# EAGLE board SparkFun_AzureWave_Module_Thing_Plus_AW-CU488-Panel_b (EAGLE 9.6.2), part 1 of 5
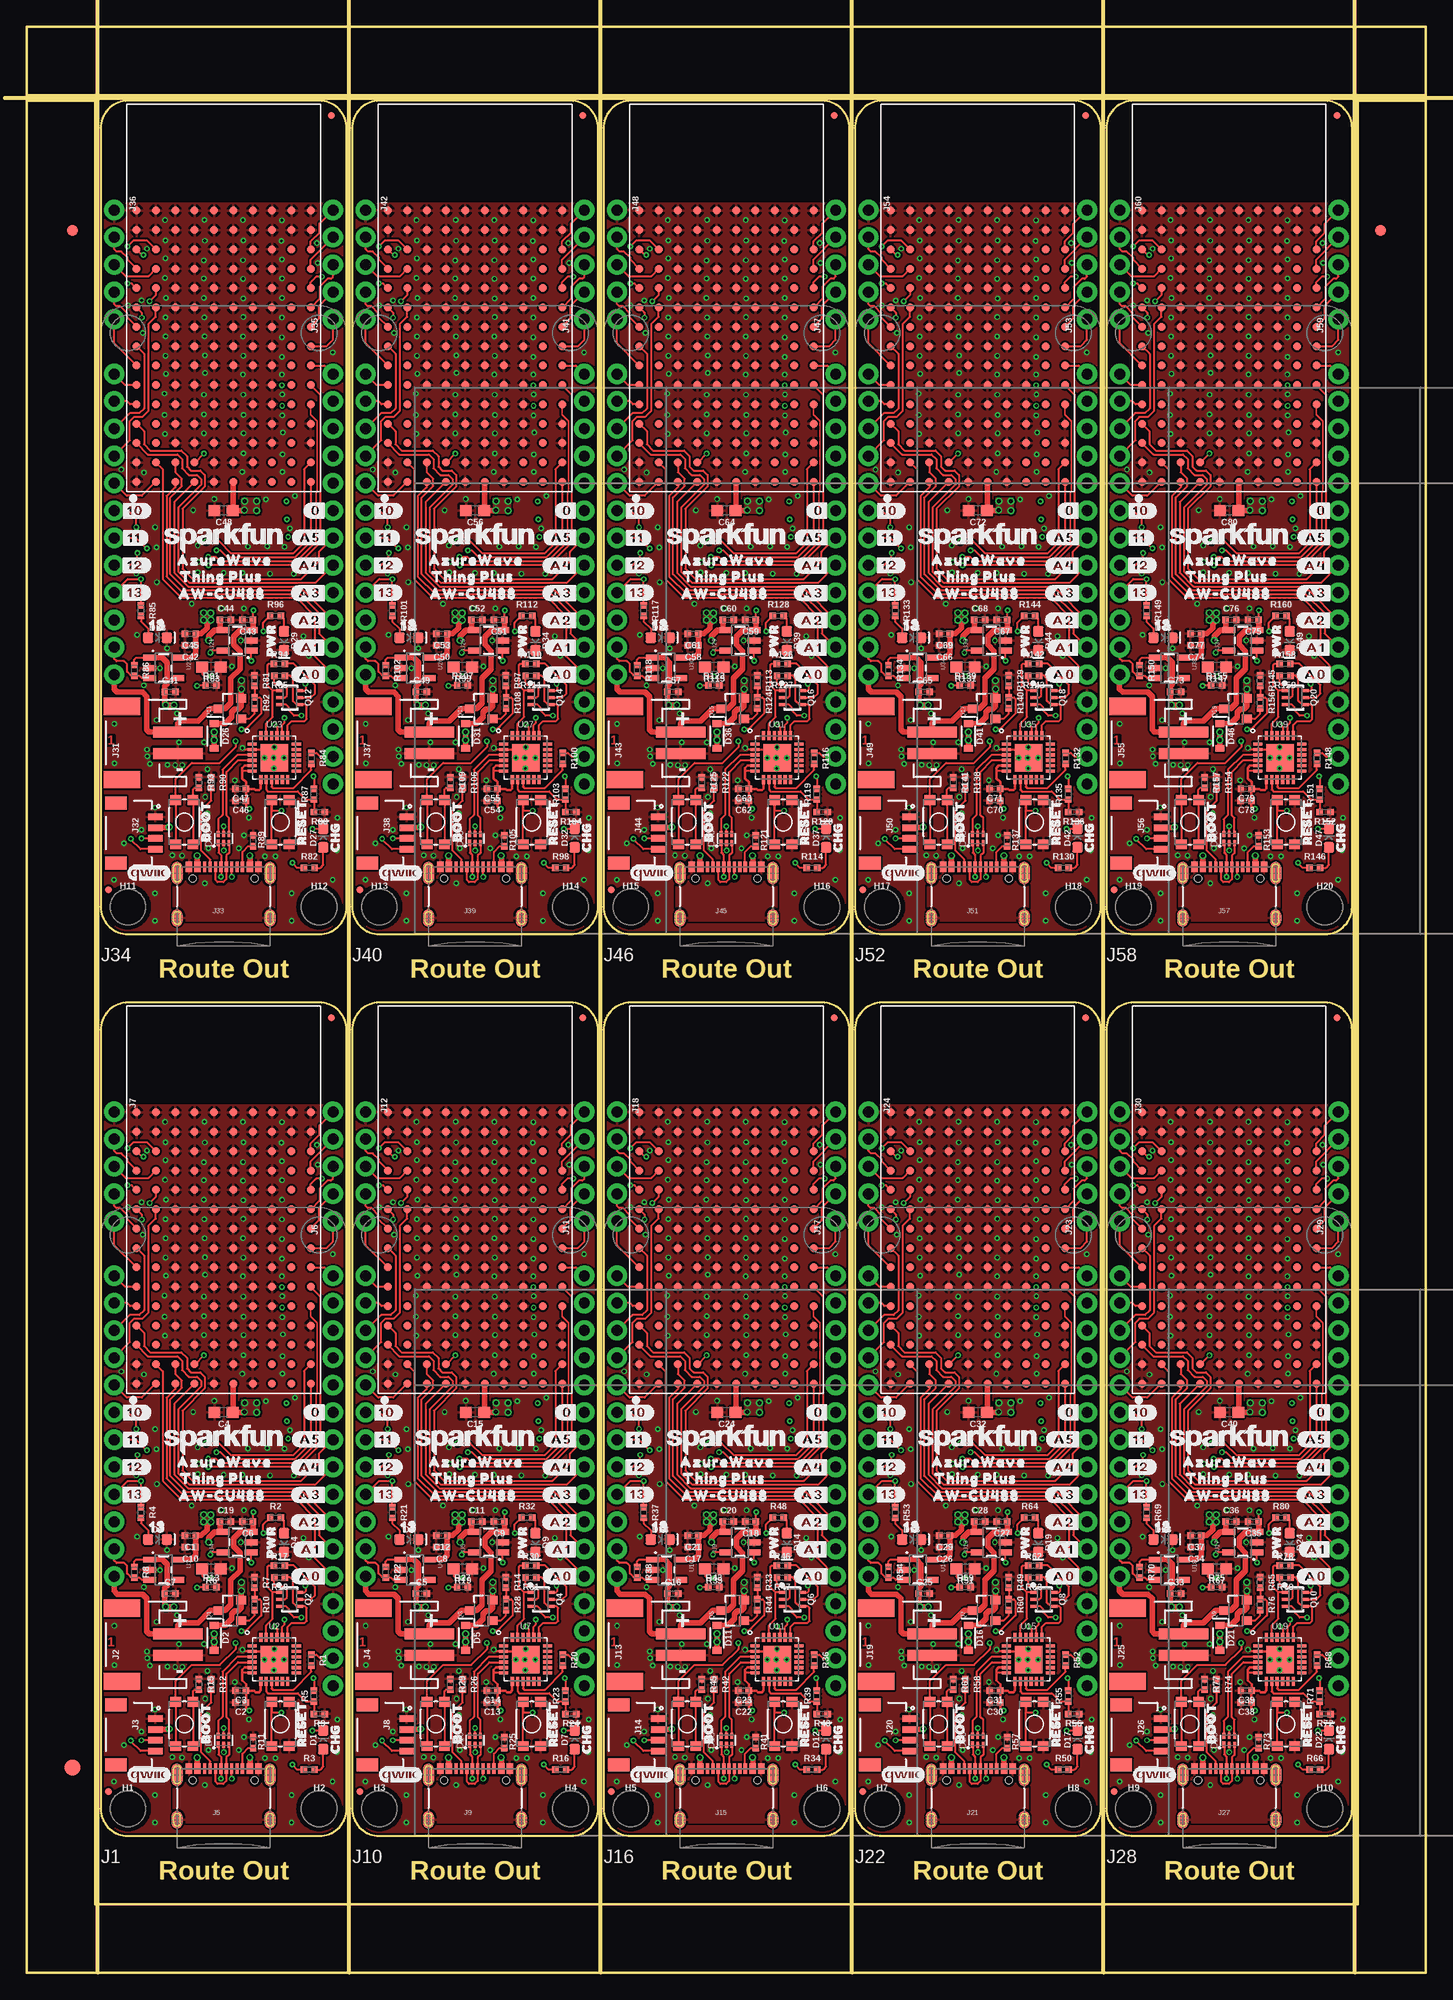
[diagram p0: board, top side]
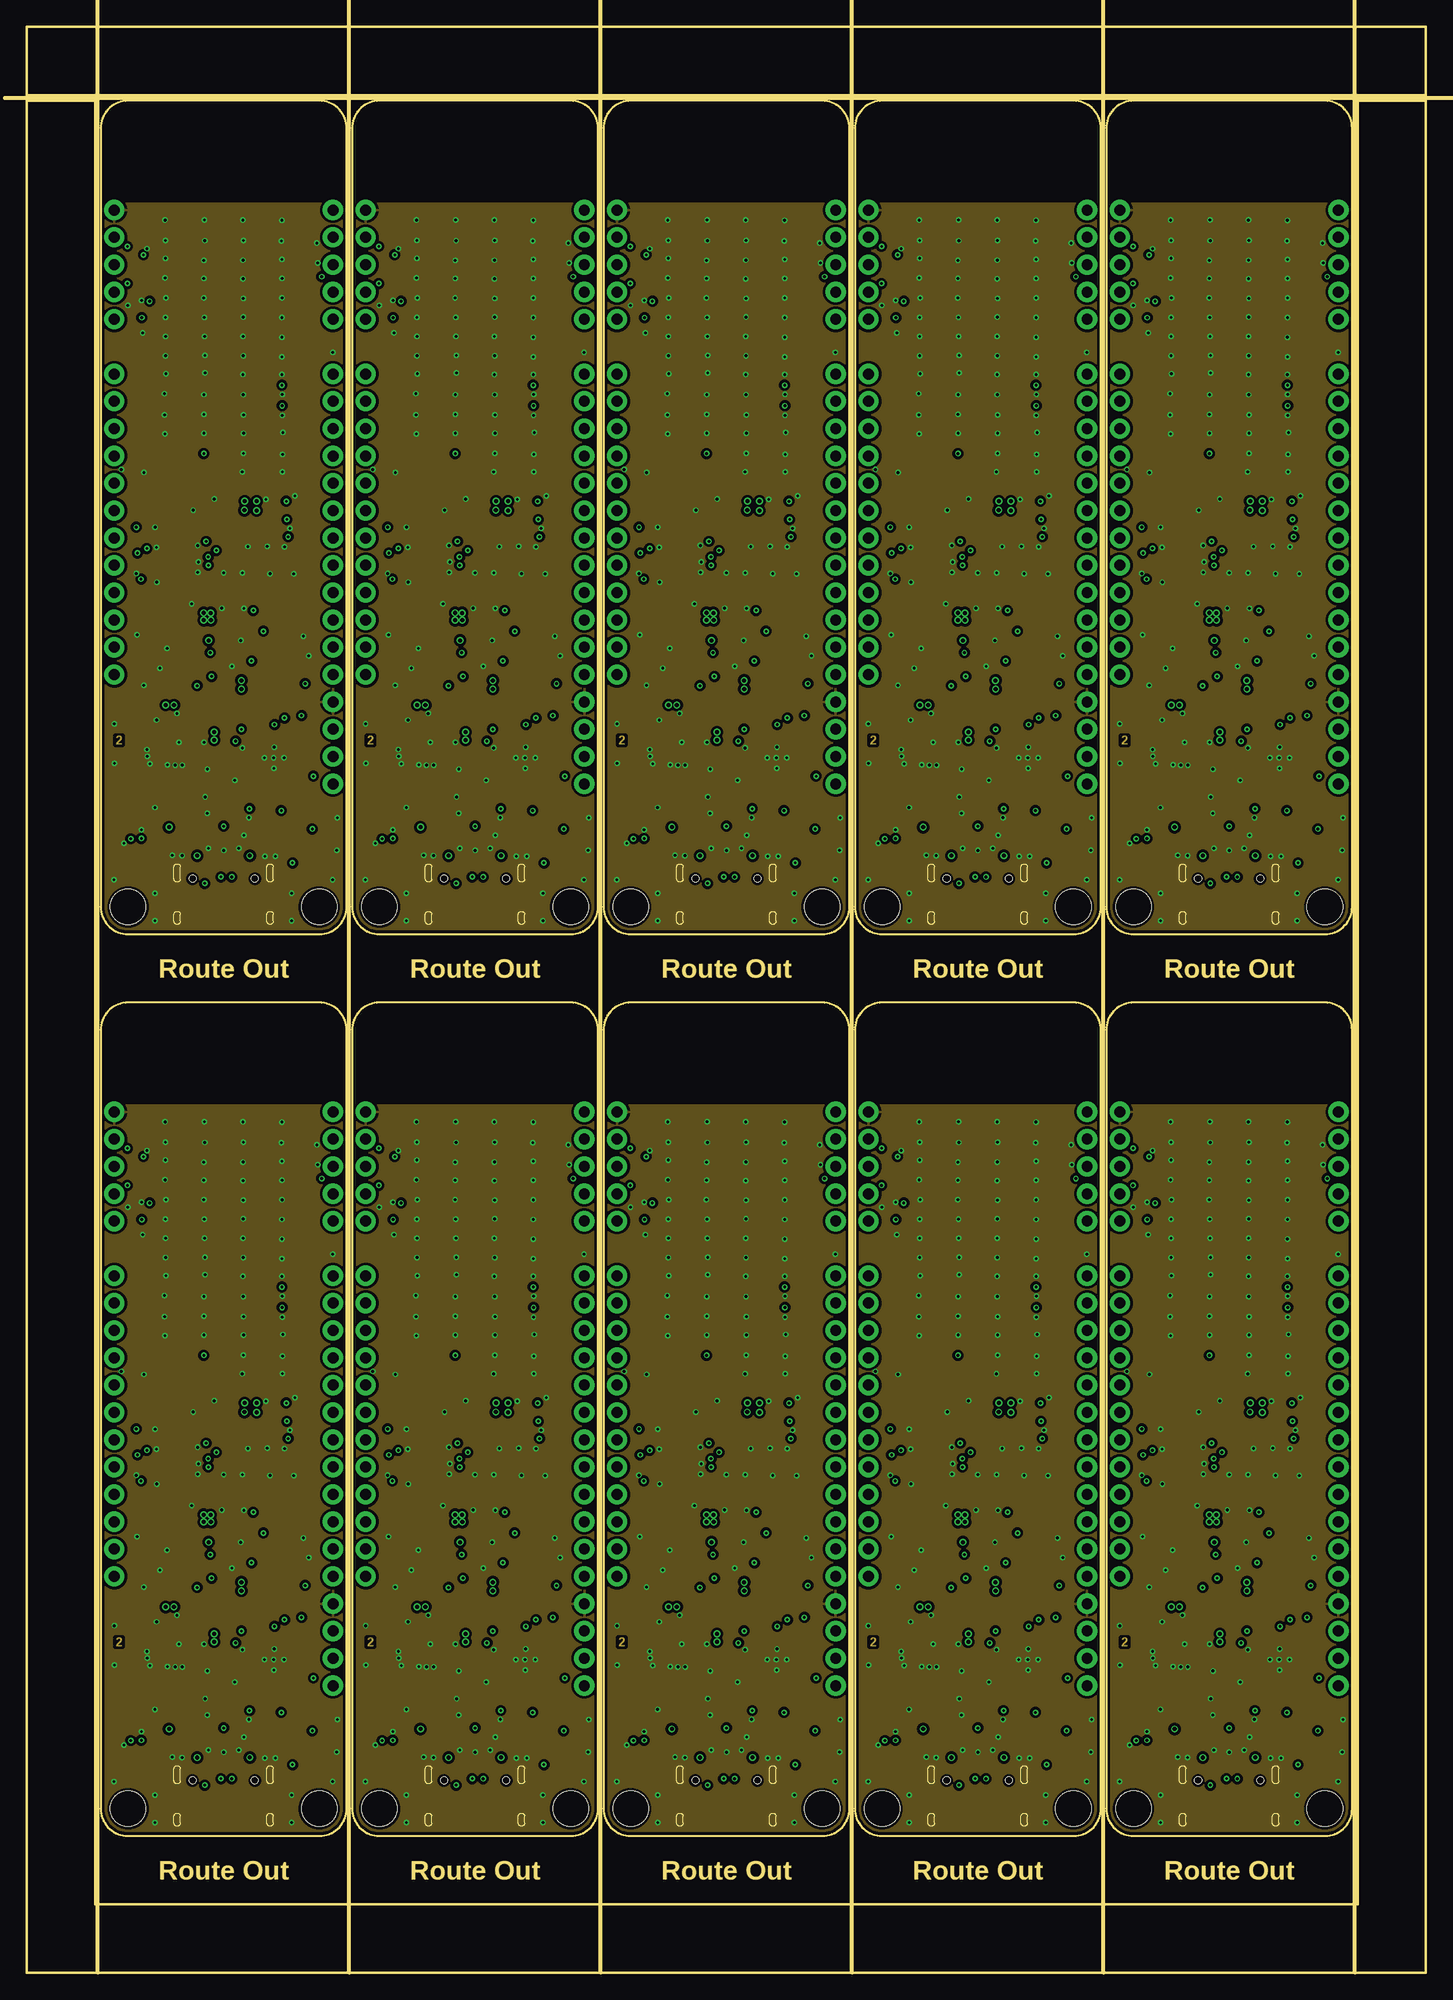
[diagram p1: board, inner layer Route2]
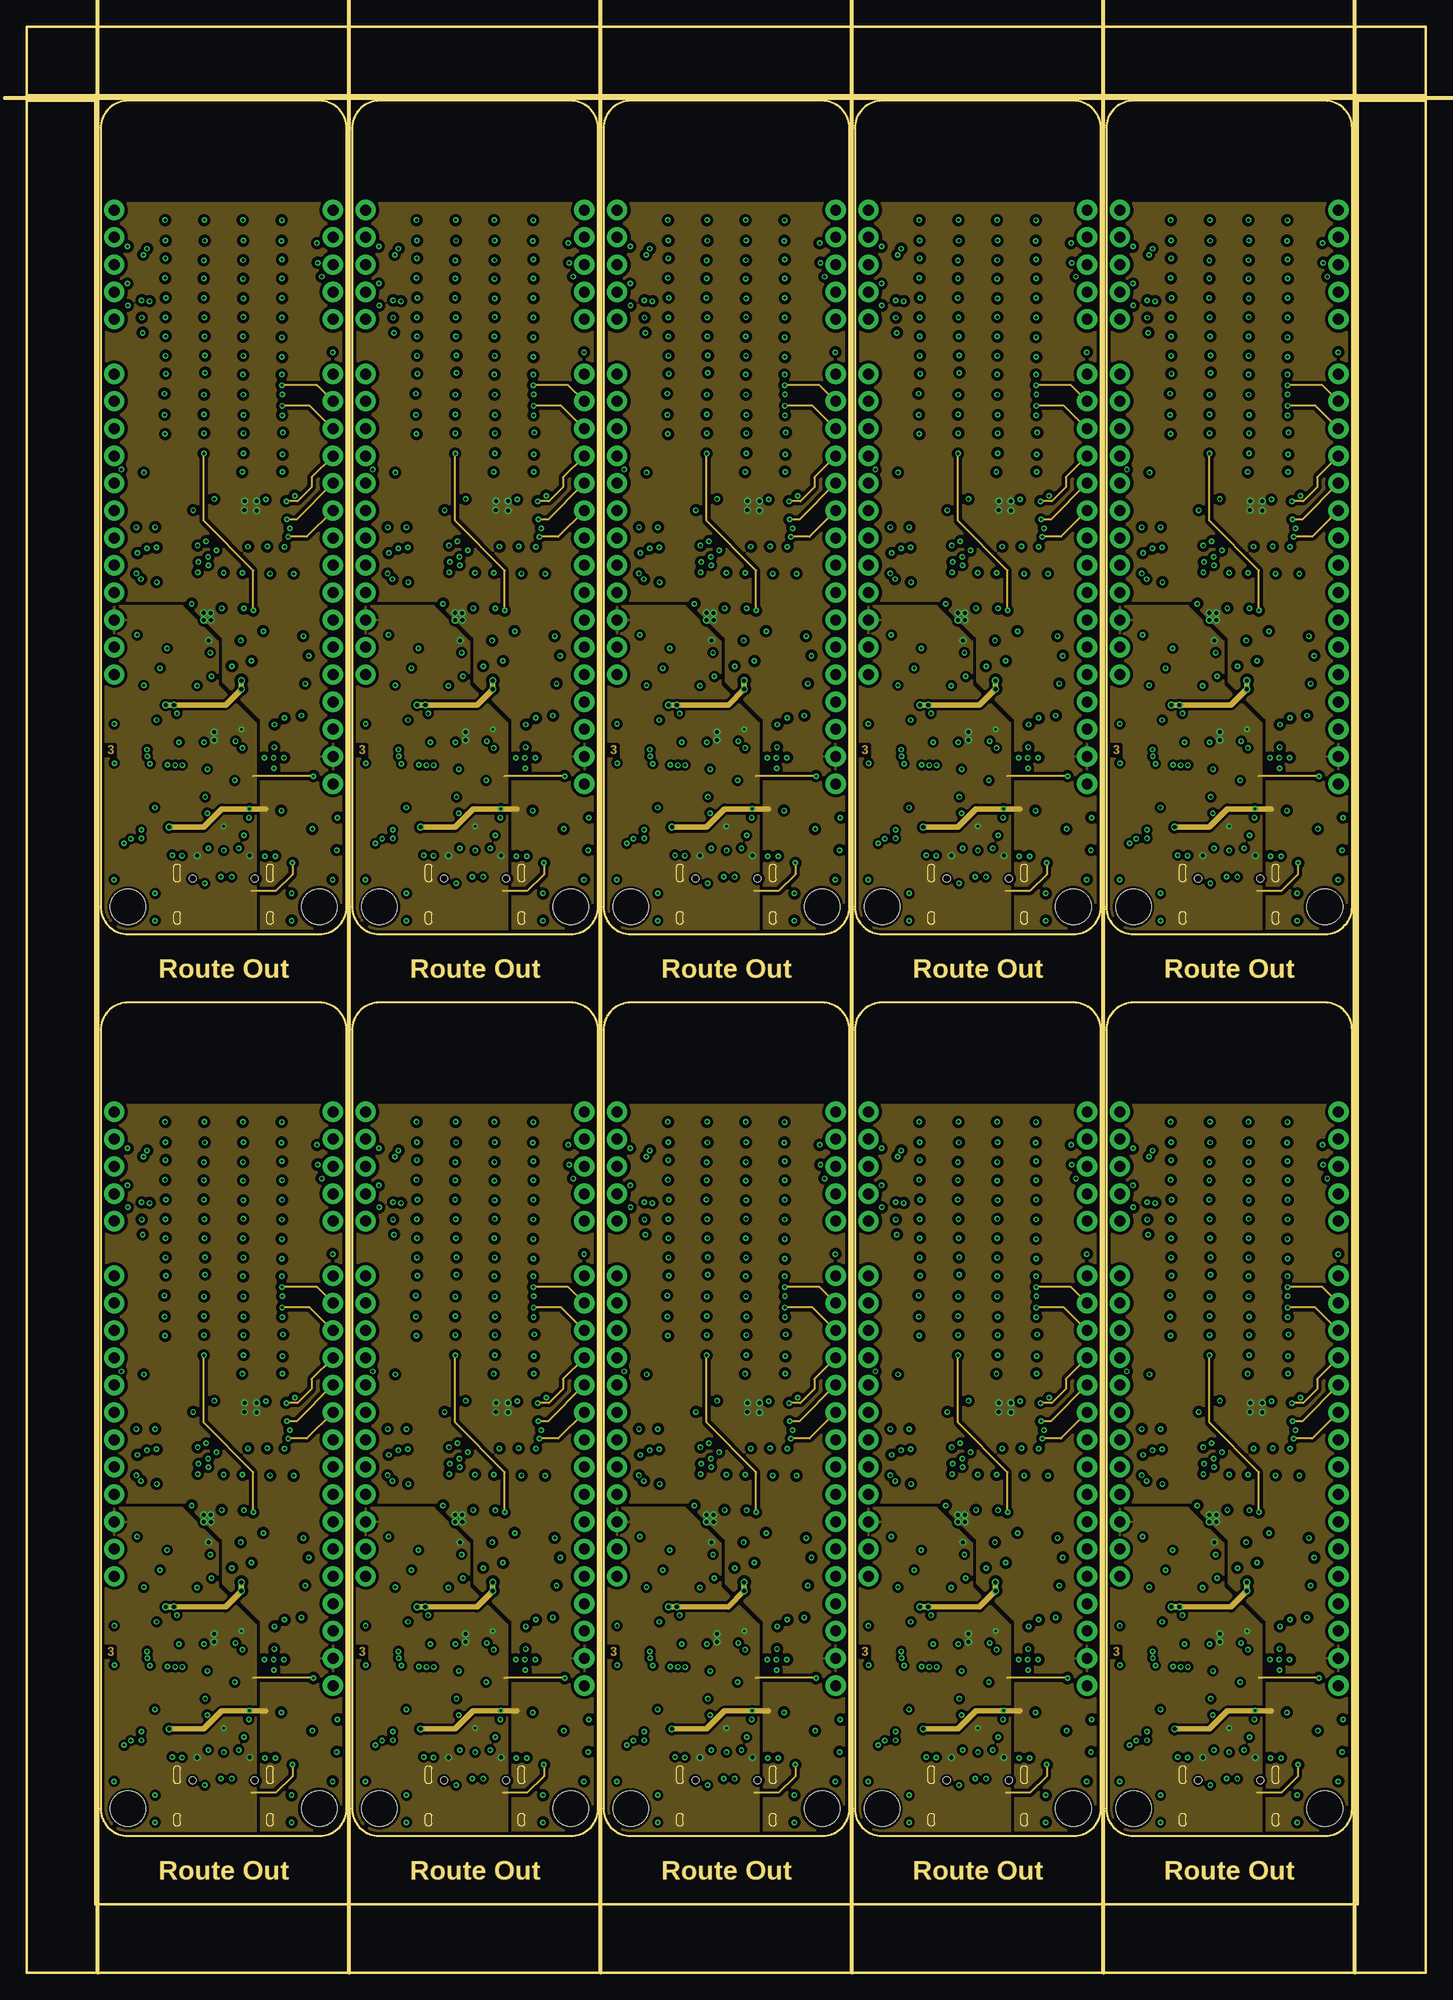
[diagram p2: board, inner layer Route15]
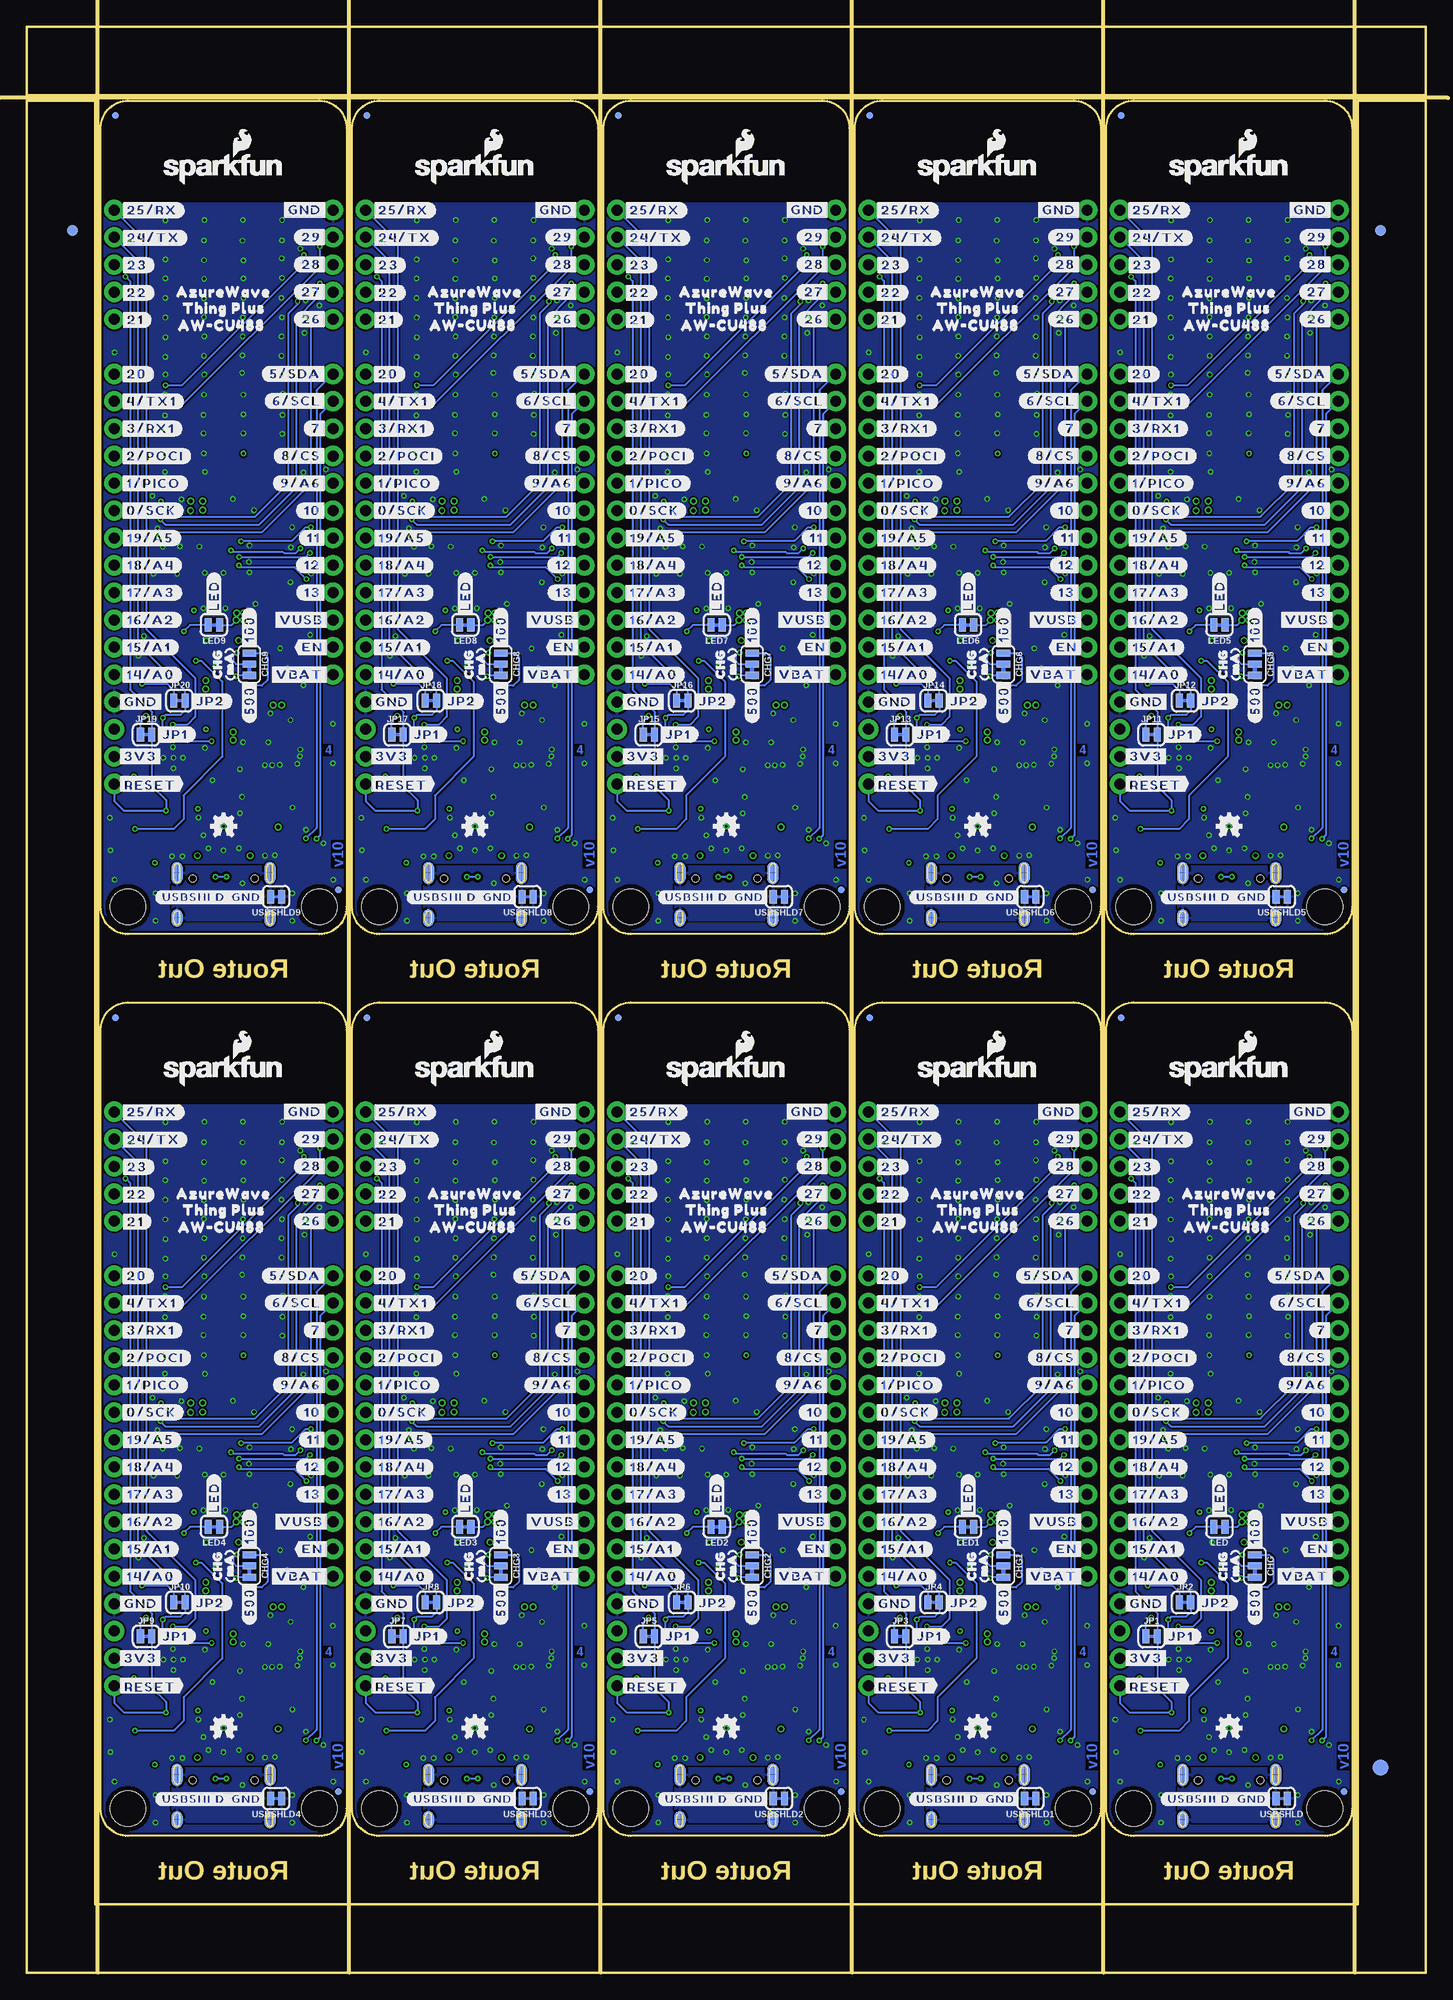
[diagram p3: board, bottom side, seen from below]

Size 130.05 x 180.85 mm. Coordinates in mm from the lower left corner, seen from the top.
Outline: 29.72,15.24 29.72,87.63 arc90 27.18,90.17 9.4,90.17 arc90 6.86,87.63 6.86,15.24 arc90 9.4,12.7 27.18,12.7 arc90 29.72,15.24
Outline: 53.09,15.24 53.09,87.63 arc90 50.55,90.17 32.77,90.17 arc90 30.23,87.63 30.23,15.24 arc90 32.77,12.7 50.55,12.7 arc90 53.09,15.24
Outline: 76.45,15.24 76.45,87.63 arc90 73.91,90.17 56.13,90.17 arc90 53.59,87.63 53.59,15.24 arc90 56.13,12.7 73.91,12.7 arc90 76.45,15.24
Outline: 99.82,15.24 99.82,87.63 arc90 97.28,90.17 79.5,90.17 arc90 76.96,87.63 76.96,15.24 arc90 79.5,12.7 97.28,12.7 arc90 99.82,15.24
Outline: 123.19,15.24 123.19,87.63 arc90 120.65,90.17 102.87,90.17 arc90 100.33,87.63 100.33,15.24 arc90 102.87,12.7 120.65,12.7 arc90 123.19,15.24
Outline: 29.72,99.06 29.72,171.45 arc90 27.18,173.99 9.4,173.99 arc90 6.86,171.45 6.86,99.06 arc90 9.4,96.52 27.18,96.52 arc90 29.72,99.06
Outline: 53.09,99.06 53.09,171.45 arc90 50.55,173.99 32.77,173.99 arc90 30.23,171.45 30.23,99.06 arc90 32.77,96.52 50.55,96.52 arc90 53.09,99.06
Outline: 76.45,99.06 76.45,171.45 arc90 73.91,173.99 56.13,173.99 arc90 53.59,171.45 53.59,99.06 arc90 56.13,96.52 73.91,96.52 arc90 76.45,99.06
Outline: 99.82,99.06 99.82,171.45 arc90 97.28,173.99 79.5,173.99 arc90 76.96,171.45 76.96,99.06 arc90 79.5,96.52 97.28,96.52 arc90 99.82,99.06
Outline: 123.19,99.06 123.19,171.45 arc90 120.65,173.99 102.87,173.99 arc90 100.33,171.45 100.33,99.06 arc90 102.87,96.52 120.65,96.52 arc90 123.19,99.06
Outline: 6.35,6.35 123.7,6.35 123.7,173.99 130.05,173.99 130.05,0 0,0 0,6.35 0,173.99 6.35,173.99 6.35,6.35
Outline: 0,180.85 130.05,180.85 130.05,174.5 0,174.5 0,180.85
Copper layers (1*2*15*16): Top 0.035559375mm / dielectric 0.47751875mm / Route2 0.035559375mm / dielectric 0.47751875mm / Route15 0.035559375mm / dielectric 0.47751875mm / Bottom 0.035559375mm
Design rules "SparkFun_AzureWave_Module_Thing_Plus_AW-CU488": minimum track width 5mil, minimum drill 0.2mm, track to track 5mil, track to pad 5mil, pad to pad 5mil, via to via 5mil, smd to smd 5mil, copper to edge 7mil, drill to drill 7mil, minimum pad ring 5mil, minimum via ring 5mil, stop-mask expansion 2.5mil, vias tented up to drill 25mil, thermal gap 10mil
tRestrict: area 24.4,29 to 24.4,29.2; area 21.6,29 to 21.6,29.3; area 22.9,27.7 to 23.1,27.8; area 22.8,30.5 to 23.1,30.5; area 47.7,29 to 47.8,29.2; area 44.9,29 to 45,29.3; area 46.2,27.7 to 46.5,27.8; area 46.2,30.5 to 46.5,30.5; area 71.1,29 to 71.2,29.2; area 68.3,29 to 68.4,29.3; area 69.6,27.7 to 69.8,27.8; area 69.6,30.5 to 69.8,30.5; area 94.5,29 to 94.5,29.2; area 91.7,29 to 91.7,29.3; area 93,27.7 to 93.2,27.8; area 92.9,30.5 to 93.2,30.5; area 117.8,29 to 117.9,29.2; area 115,29 to 115.1,29.3; area 116.3,27.7 to 116.6,27.8; area 116.3,30.5 to 116.6,30.5; area 24.4,112.8 to 24.4,113.1; area 21.6,112.8 to 21.6,113.1; area 22.9,111.5 to 23.1,111.6; area 22.8,114.3 to 23.1,114.4; area 47.7,112.8 to 47.8,113.1; area 44.9,112.8 to 45,113.1; area 46.2,111.5 to 46.5,111.6; area 46.2,114.3 to 46.5,114.4; area 71.1,112.8 to 71.2,113.1; area 68.3,112.8 to 68.4,113.1; area 69.6,111.5 to 69.8,111.6; area 69.6,114.3 to 69.8,114.4; area 94.5,112.8 to 94.5,113.1; area 91.7,112.8 to 91.7,113.1; area 93,111.5 to 93.2,111.6; area 92.9,114.3 to 93.2,114.4; area 117.8,112.8 to 117.9,113.1; area 115,112.8 to 115.1,113.1; area 116.3,111.5 to 116.6,111.6; area 116.3,114.3 to 116.6,114.4
Milling: 7 lines

## Footprints (pad centres in the part's own frame; a part is rotated, then mirrored left to right if it is on the bottom)
0402-TIGHT = smd 0.6 x 0.6: 1 -0.5,0; 2 0.5,0
0603 = smd 1.1 x 1: 1 -0.85,0; 2 0.85,0
SMT-JUMPER_3_1-NC_TRACE_SILK = smd 0.66 x 1.27: 1 -1.041,0; 2 0,0; 3 1.041,0
LED-0603 = smd 1 x 1: A -0.877,0; C 0.877,0
SOD-323 = smd 0.63 x 0.83: A 1.15,0; C -1.15,0
SOT886 = smd 0.61 x 0.25: 1 -0.405,0.5 | smd 0.56 x 0.25: 2 -0.43,0; 3 -0.43,-0.5; 4 0.43,-0.5; 5 0.43,0; 6 0.43,0.5
FIDUCIAL-1X2 = smd 1 x 1: 1 0,0
FIDUCIAL-1.5X3 = smd 1.5 x 1.5: 1 0,0
FIDUCIAL-MICRO = smd 0.635 x 0.635: 1 0,0
STAND-OFF = hole 3.302: 0,0
THING_PLUS = drill 1.016 pad 1.88: 1 1.27,52.07; 2 1.27,49.53; 3 1.27,46.99; 4 1.27,44.45; 5 1.27,41.91; 6 1.27,39.37; 7 1.27,36.83; 8 1.27,34.29; 9 1.27,31.75; 10 1.27,29.21; 11 1.27,26.67; 12 1.27,24.13; 13 21.59,52.07; 14 21.59,49.53; 15 21.59,46.99; 16 21.59,44.45; 17 21.59,41.91; 18 21.59,39.37; 19 21.59,36.83; 20 21.59,34.29; 21 21.59,31.75; 22 21.59,29.21; 23 21.59,26.67; 24 21.59,24.13; 25 21.59,21.59; 26 21.59,19.05; 27 21.59,16.51; 28 21.59,13.97
JST-2-SMD = smd 1 x 4.6: 1 -1,-3.7; 2 1,-3.7 | smd 1.6 x 3.4: NC1 -3.4,1.5; NC2 3.4,1.5
JST04_1MM_RA = smd 0.6 x 1.35: 1 -1.5,0; 2 -0.5,0; 3 0.5,0; 4 1.5,0 | smd 1.2 x 2: NC1 2.8,-3.675; NC2 -2.8,-3.675
USB-C-16P-4LAYER-ISOLATED = smd 0.3 x 1: A5 -1.25,-0.34; A6 -0.25,-0.34; A7 0.25,-0.34; A8 1.25,-0.34; B5 1.75,-0.34; B6 0.75,-0.34; B7 -0.75,-0.34; B8 -1.75,-0.34 | smd 0.6 x 1: GND -3.225,-0.34; GND2 3.225,-0.34; VBUS1 -2.45,-0.34; VBUS2 2.45,-0.34 | smd 1 x 2.1: SHLD1 -4.32,-0.915; SHLD2 4.32,-0.915 | smd 1 x 2.1 bottom: SHLD3 -4.32,-0.915; SHLD4 4.32,-0.915 | smd 1 x 1.6: SHLD5 -4.32,-5.095; SHLD8 4.32,-5.095 | smd 1 x 1.6 bottom: SHLD6 -4.32,-5.095; SHLD7 4.32,-5.095 | hole 0.65: -2.89,-1.445; 2.89,-1.445
1X05_NO_SILK = drill 1.016 pad 1.88: 1 0,0; 2 2.54,0; 3 5.08,0; 4 7.62,0; 5 10.16,0
SMT-JUMPER_2_NC_TRACE_SILK = smd 0.66 x 1.27: 1 -0.521,0; 2 0.521,0
SOT23-3 = smd 0.8 x 0.9: 1 -0.95,-1; 2 0.95,-1; 3 0,1.1
SC70-6 = smd 0.3 x 0.66: 1 -0.65,-0.92; 2 0,-0.92; 3 0.65,-0.92; 4 0.65,0.92; 5 0,0.92; 6 -0.65,0.92
TACTILE_SWITCH_SMD_4.6X2.8MM = smd 0.9 x 1: 1 -2.05,-0.8; 2 2.05,-0.8; 3 2.05,0.8; 4 -2.05,0.8
LGA150_AW-CU488 = smd 0.75 x 0.75: A1 15.1,-8.1; A2 13.3,-8.1; A3 11.5,-8.1; A4 9.7,-8.1; A5 7.9,-8.1; A6 6.1,-8.1; A7 4.3,-8.1; A8 2.5,-8.1; A9 0.7,-8.1; A10 -1.1,-8.1; A11 -2.9,-8.1; A12 -4.7,-8.1; A13 -6.5,-8.1; A14 -8.3,-8.1; A15 -10.1,-8.1; B1 15.1,-6.3; B2 13.3,-6.3; B3 11.5,-6.3; B4 9.7,-6.3; B5 7.9,-6.3; B6 6.1,-6.3; B7 4.3,-6.3; B8 2.5,-6.3; B9 0.7,-6.3; B10 -1.1,-6.3; B11 -2.9,-6.3; B12 -4.7,-6.3; B13 -6.5,-6.3; B14 -8.3,-6.3; B15 -10.1,-6.3; C1 15.1,-4.5; C2 13.3,-4.5; C3 11.5,-4.5; C4 9.7,-4.5; C5 7.9,-4.5; C6 6.1,-4.5; C7 4.3,-4.5; C8 2.5,-4.5; C9 0.7,-4.5; C10 -1.1,-4.5; C11 -2.9,-4.5; C12 -4.7,-4.5; C13 -6.5,-4.5; C14 -8.3,-4.5; C15 -10.1,-4.5; D1 15.1,-2.7; D2 13.3,-2.7; D3 11.5,-2.7; D4 9.7,-2.7; D5 7.9,-2.7; D6 6.1,-2.7; D7 4.3,-2.7; D8 2.5,-2.7; D9 0.7,-2.7; D10 -1.1,-2.7; D11 -2.9,-2.7; D12 -4.7,-2.7; D13 -6.5,-2.7; D14 -8.3,-2.7; D15 -10.1,-2.7; E1 15.1,-0.9; E2 13.3,-0.9; E3 11.5,-0.9; E4 9.7,-0.9; E5 7.9,-0.9; E6 6.1,-0.9; E7 4.3,-0.9; E8 2.5,-0.9; E9 0.7,-0.9; E10 -1.1,-0.9; E11 -2.9,-0.9; E12 -4.7,-0.9; E13 -6.5,-0.9; E14 -8.3,-0.9; E15 -10.1,-0.9; F1 15.1,0.9; F2 13.3,0.9; F3 11.5,0.9; F4 9.7,0.9; F5 7.9,0.9; F6 6.1,0.9; F7 4.3,0.9; F8 2.5,0.9; F9 0.7,0.9; F10 -1.1,0.9; F11 -2.9,0.9; F12 -4.7,0.9; F13 -6.5,0.9; F14 -8.3,0.9; F15 -10.1,0.9; G1 15.1,2.7; G2 13.3,2.7; G3 11.5,2.7; G4 9.7,2.7; G5 7.9,2.7; G6 6.1,2.7; G7 4.3,2.7; G8 2.5,2.7; G9 0.7,2.7; G10 -1.1,2.7; G11 -2.9,2.7; G12 -4.7,2.7; G13 -6.5,2.7; G14 -8.3,2.7; G15 -10.1,2.7; H1 15.1,4.5; H2 13.3,4.5; H3 11.5,4.5; H4 9.7,4.5; H5 7.9,4.5; H6 6.1,4.5; H7 4.3,4.5; H8 2.5,4.5; H9 0.7,4.5; H10 -1.1,4.5; H11 -2.9,4.5; H12 -4.7,4.5; H13 -6.5,4.5; H14 -8.3,4.5; H15 -10.1,4.5; J1 15.1,6.3; J2 13.3,6.3; J3 11.5,6.3; J4 9.7,6.3; J5 7.9,6.3; J6 6.1,6.3; J7 4.3,6.3; J8 2.5,6.3; J9 0.7,6.3; J10 -1.1,6.3; J11 -2.9,6.3; J12 -4.7,6.3; J13 -6.5,6.3; J14 -8.3,6.3; J15 -10.1,6.3; K1 15.1,8.1; K2 13.3,8.1; K3 11.5,8.1; K4 9.7,8.1; K5 7.9,8.1; K6 6.1,8.1; K7 4.3,8.1; K8 2.5,8.1; K9 0.7,8.1; K10 -1.1,8.1; K11 -2.9,8.1; K12 -4.7,8.1; K13 -6.5,8.1; K14 -8.3,8.1; K15 -10.1,8.1
QFN24 = smd 0.85 x 0.3: 1 -2.05,1.25; 2 -2.05,0.75; 3 -2.05,0.25; 4 -2.05,-0.25; 5 -2.05,-0.75; 6 -2.05,-1.25; 13 2.05,-1.25; 14 2.05,-0.75; 15 2.05,-0.25; 16 2.05,0.25; 17 2.05,0.75; 18 2.05,1.25 | smd 0.3 x 0.85: 7 -1.25,-2.05; 8 -0.75,-2.05; 9 -0.25,-2.05; 10 0.25,-2.05; 11 0.75,-2.05; 12 1.25,-2.05; 19 1.25,2.05; 20 0.75,2.05; 21 0.25,2.05; 22 -0.25,2.05; 23 -0.75,2.05; 24 -1.25,2.05 | smd 2.55 x 2.55: PAD 0,0
SOT23-5 = smd 0.55 x 1.2: 1 -0.95,-1.3; 2 0,-1.3; 3 0.95,-1.3; 4 0.95,1.3; 5 -0.95,1.3

## Placement (x,y rotation side)
C1  10uF  [0402-TIGHT]  15.19,40.63 180 top
C2  0.1uF  [0402-TIGHT]  19.87,25.12 180 top
C3  4.7uF  [0402-TIGHT]  19.87,26.21 180 top
C4  10uF  [0603]  18.29,52.07 180 top
C5  1.0uF  [0402-TIGHT]  36.68,35.23 0 top
C6  4.7uF  [0402-TIGHT]  20.52,41.9 180 top
C7  1.0uF  [0402-TIGHT]  13.31,35.23 0 top
C8  1.0uF  [0402-TIGHT]  38.55,39.54 180 top
C9  4.7uF  [0402-TIGHT]  43.89,41.9 180 top
C10  1.0uF  [0402-TIGHT]  15.18,39.54 180 top
C11  4.7uF  [0402-TIGHT]  41.82,41.91 0 top
C12  10uF  [0402-TIGHT]  38.56,40.63 180 top
C13  0.1uF  [0402-TIGHT]  43.24,25.12 180 top
C14  4.7uF  [0402-TIGHT]  43.24,26.21 180 top
C15  10uF  [0603]  41.66,52.07 180 top
C16  1.0uF  [0402-TIGHT]  60.05,35.23 0 top
C17  1.0uF  [0402-TIGHT]  61.92,39.54 180 top
C18  4.7uF  [0402-TIGHT]  67.26,41.9 180 top
C19  4.7uF  [0402-TIGHT]  18.45,41.91 0 top
C20  4.7uF  [0402-TIGHT]  65.19,41.91 0 top
C21  10uF  [0402-TIGHT]  61.93,40.63 180 top
C22  0.1uF  [0402-TIGHT]  66.6,25.12 180 top
C23  4.7uF  [0402-TIGHT]  66.61,26.21 180 top
C24  10uF  [0603]  65.02,52.07 180 top
C25  1.0uF  [0402-TIGHT]  83.41,35.23 0 top
C26  1.0uF  [0402-TIGHT]  85.29,39.54 180 top
C27  4.7uF  [0402-TIGHT]  90.62,41.9 180 top
C28  4.7uF  [0402-TIGHT]  88.56,41.91 0 top
C29  10uF  [0402-TIGHT]  85.3,40.63 180 top
C30  0.1uF  [0402-TIGHT]  89.97,25.12 180 top
C31  4.7uF  [0402-TIGHT]  89.97,26.21 180 top
C32  10uF  [0603]  88.39,52.07 180 top
C33  1.0uF  [0402-TIGHT]  106.78,35.23 0 top
C34  1.0uF  [0402-TIGHT]  108.65,39.54 180 top
C35  4.7uF  [0402-TIGHT]  113.99,41.9 180 top
C36  4.7uF  [0402-TIGHT]  111.93,41.91 0 top
C37  10uF  [0402-TIGHT]  108.66,40.63 180 top
C38  0.1uF  [0402-TIGHT]  113.34,25.12 180 top
C39  4.7uF  [0402-TIGHT]  113.34,26.21 180 top
C40  10uF  [0603]  111.76,52.07 180 top
C41  1.0uF  [0402-TIGHT]  13.31,119.05 0 top
C42  1.0uF  [0402-TIGHT]  15.18,123.36 180 top
C43  4.7uF  [0402-TIGHT]  20.52,125.72 180 top
C44  4.7uF  [0402-TIGHT]  18.45,125.73 0 top
C45  10uF  [0402-TIGHT]  15.19,124.45 180 top
C46  0.1uF  [0402-TIGHT]  19.87,108.94 180 top
C47  4.7uF  [0402-TIGHT]  19.87,110.03 180 top
C48  10uF  [0603]  18.29,135.89 180 top
C49  1.0uF  [0402-TIGHT]  36.68,119.05 0 top
C50  1.0uF  [0402-TIGHT]  38.55,123.36 180 top
C51  4.7uF  [0402-TIGHT]  43.89,125.72 180 top
C52  4.7uF  [0402-TIGHT]  41.82,125.73 0 top
C53  10uF  [0402-TIGHT]  38.56,124.45 180 top
C54  0.1uF  [0402-TIGHT]  43.24,108.94 180 top
C55  4.7uF  [0402-TIGHT]  43.24,110.03 180 top
C56  10uF  [0603]  41.66,135.89 180 top
C57  1.0uF  [0402-TIGHT]  60.05,119.05 0 top
C58  1.0uF  [0402-TIGHT]  61.92,123.36 180 top
C59  4.7uF  [0402-TIGHT]  67.26,125.72 180 top
C60  4.7uF  [0402-TIGHT]  65.19,125.73 0 top
C61  10uF  [0402-TIGHT]  61.93,124.45 180 top
C62  0.1uF  [0402-TIGHT]  66.6,108.94 180 top
C63  4.7uF  [0402-TIGHT]  66.61,110.03 180 top
C64  10uF  [0603]  65.02,135.89 180 top
C65  1.0uF  [0402-TIGHT]  83.41,119.05 0 top
C66  1.0uF  [0402-TIGHT]  85.29,123.36 180 top
C67  4.7uF  [0402-TIGHT]  90.62,125.72 180 top
C68  4.7uF  [0402-TIGHT]  88.56,125.73 0 top
C69  10uF  [0402-TIGHT]  85.3,124.45 180 top
C70  0.1uF  [0402-TIGHT]  89.97,108.94 180 top
C71  4.7uF  [0402-TIGHT]  89.97,110.03 180 top
C72  10uF  [0603]  88.39,135.89 180 top
C73  1.0uF  [0402-TIGHT]  106.78,119.05 0 top
C74  1.0uF  [0402-TIGHT]  108.65,123.36 180 top
C75  4.7uF  [0402-TIGHT]  113.99,125.72 180 top
C76  4.7uF  [0402-TIGHT]  111.93,125.73 0 top
C77  10uF  [0402-TIGHT]  108.66,124.45 180 top
C78  0.1uF  [0402-TIGHT]  113.34,108.94 180 top
C79  4.7uF  [0402-TIGHT]  113.34,110.03 180 top
C80  10uF  [0603]  111.76,135.89 180 top
CHG  [SMT-JUMPER_3_1-NC_TRACE_SILK]  15.9,37.8 270 bottom
CHG1  [SMT-JUMPER_3_1-NC_TRACE_SILK]  39.27,37.8 270 bottom
CHG2  [SMT-JUMPER_3_1-NC_TRACE_SILK]  62.64,37.8 270 bottom
CHG3  [SMT-JUMPER_3_1-NC_TRACE_SILK]  86,37.8 270 bottom
CHG4  [SMT-JUMPER_3_1-NC_TRACE_SILK]  109.37,37.8 270 bottom
CHG5  [SMT-JUMPER_3_1-NC_TRACE_SILK]  15.9,121.62 270 bottom
CHG6  [SMT-JUMPER_3_1-NC_TRACE_SILK]  39.27,121.62 270 bottom
CHG7  [SMT-JUMPER_3_1-NC_TRACE_SILK]  62.64,121.62 270 bottom
CHG8  [SMT-JUMPER_3_1-NC_TRACE_SILK]  86,121.62 270 bottom
CHG9  [SMT-JUMPER_3_1-NC_TRACE_SILK]  109.37,121.62 270 bottom
D1  Yellow  [LED-0603]  27.56,21.64 90 top
D2  1A/23V/620mV  [SOD-323]  17.4,31.11 270 top
D3  BLUE  [LED-0603]  12.14,40.26 0 top
D4  RED  [LED-0603]  23.91,39.97 270 top
D5  1A/23V/620mV  [SOD-323]  40.77,31.11 270 top
D6  PRTR5V0U2F  [SOT886]  18.29,21.59 90 top
D7  Yellow  [LED-0603]  50.93,21.64 90 top
D8  BLUE  [LED-0603]  35.5,40.26 0 top
D9  RED  [LED-0603]  47.28,39.97 270 top
D10  PRTR5V0U2F  [SOT886]  41.66,21.59 90 top
D11  1A/23V/620mV  [SOD-323]  64.14,31.11 270 top
D12  Yellow  [LED-0603]  74.3,21.64 90 top
D13  BLUE  [LED-0603]  58.87,40.26 0 top
D14  RED  [LED-0603]  70.65,39.97 270 top
D15  PRTR5V0U2F  [SOT886]  65.02,21.59 90 top
D16  1A/23V/620mV  [SOD-323]  87.5,31.11 270 top
D17  Yellow  [LED-0603]  97.66,21.64 90 top
D18  BLUE  [LED-0603]  82.24,40.26 0 top
D19  RED  [LED-0603]  94.01,39.97 270 top
D20  PRTR5V0U2F  [SOT886]  88.39,21.59 90 top
D21  1A/23V/620mV  [SOD-323]  110.87,31.11 270 top
D22  Yellow  [LED-0603]  121.03,21.64 90 top
D23  BLUE  [LED-0603]  105.61,40.26 0 top
D24  RED  [LED-0603]  117.38,39.97 270 top
D25  PRTR5V0U2F  [SOT886]  111.76,21.59 90 top
D26  1A/23V/620mV  [SOD-323]  17.4,114.94 270 top
D27  Yellow  [LED-0603]  27.56,105.46 90 top
D28  BLUE  [LED-0603]  12.14,124.08 0 top
D29  RED  [LED-0603]  23.91,123.79 270 top
D30  PRTR5V0U2F  [SOT886]  18.29,105.41 90 top
D31  1A/23V/620mV  [SOD-323]  40.77,114.94 270 top
D32  Yellow  [LED-0603]  50.93,105.46 90 top
D33  BLUE  [LED-0603]  35.5,124.08 0 top
D34  RED  [LED-0603]  47.28,123.79 270 top
D35  PRTR5V0U2F  [SOT886]  41.66,105.41 90 top
D36  1A/23V/620mV  [SOD-323]  64.14,114.94 270 top
D37  Yellow  [LED-0603]  74.3,105.46 90 top
D38  BLUE  [LED-0603]  58.87,124.08 0 top
D39  RED  [LED-0603]  70.65,123.79 270 top
D40  PRTR5V0U2F  [SOT886]  65.02,105.41 90 top
D41  1A/23V/620mV  [SOD-323]  87.5,114.94 270 top
D42  Yellow  [LED-0603]  97.66,105.46 90 top
D43  BLUE  [LED-0603]  82.24,124.08 0 top
D44  RED  [LED-0603]  94.01,123.79 270 top
D45  PRTR5V0U2F  [SOT886]  88.39,105.41 90 top
D46  1A/23V/620mV  [SOD-323]  110.87,114.94 270 top
D47  Yellow  [LED-0603]  121.03,105.46 90 top
D48  BLUE  [LED-0603]  105.61,124.08 0 top
D49  RED  [LED-0603]  117.38,123.79 270 top
D50  PRTR5V0U2F  [SOT886]  111.76,105.41 90 top
E$1  [FIDUCIAL-1X2]  4.23,161.92 0 top
E$2  [FIDUCIAL-1X2]  4.23,161.92 0 bottom
E$3  [FIDUCIAL-1X2]  125.81,161.92 0 top
E$4  [FIDUCIAL-1X2]  125.81,161.92 0 bottom
E$5  [FIDUCIAL-1.5X3]  4.23,19.05 0 top
E$6  [FIDUCIAL-1.5X3]  4.23,19.05 0 bottom
FD1  FIDUCIALUFIDUCIAL  [FIDUCIAL-MICRO]  28.32,88.77 0 top
FD2  FIDUCIALUFIDUCIAL  [FIDUCIAL-MICRO]  28.32,88.77 0 bottom
FD3  FIDUCIALUFIDUCIAL  [FIDUCIAL-MICRO]  7.6,16.84 0 top
FD4  FIDUCIALUFIDUCIAL  [FIDUCIAL-MICRO]  7.6,16.84 0 bottom
FD5  FIDUCIALUFIDUCIAL  [FIDUCIAL-MICRO]  51.69,88.77 0 top
FD6  FIDUCIALUFIDUCIAL  [FIDUCIAL-MICRO]  51.69,88.77 0 bottom
FD7  FIDUCIALUFIDUCIAL  [FIDUCIAL-MICRO]  30.97,16.84 0 top
FD8  FIDUCIALUFIDUCIAL  [FIDUCIAL-MICRO]  30.97,16.84 0 bottom
FD9  FIDUCIALUFIDUCIAL  [FIDUCIAL-MICRO]  75.06,88.77 0 top
FD10  FIDUCIALUFIDUCIAL  [FIDUCIAL-MICRO]  75.06,88.77 0 bottom
FD11  FIDUCIALUFIDUCIAL  [FIDUCIAL-MICRO]  54.34,16.84 0 top
FD12  FIDUCIALUFIDUCIAL  [FIDUCIAL-MICRO]  54.34,16.84 0 bottom
FD13  FIDUCIALUFIDUCIAL  [FIDUCIAL-MICRO]  98.42,88.77 0 top
FD14  FIDUCIALUFIDUCIAL  [FIDUCIAL-MICRO]  98.42,88.77 0 bottom
FD15  FIDUCIALUFIDUCIAL  [FIDUCIAL-MICRO]  77.71,16.84 0 top
FD16  FIDUCIALUFIDUCIAL  [FIDUCIAL-MICRO]  77.71,16.84 0 bottom
FD17  FIDUCIALUFIDUCIAL  [FIDUCIAL-MICRO]  121.79,88.77 0 top
FD18  FIDUCIALUFIDUCIAL  [FIDUCIAL-MICRO]  121.79,88.77 0 bottom
FD19  FIDUCIALUFIDUCIAL  [FIDUCIAL-MICRO]  101.07,16.84 0 top
FD20  FIDUCIALUFIDUCIAL  [FIDUCIAL-MICRO]  101.07,16.84 0 bottom
FD21  FIDUCIALUFIDUCIAL  [FIDUCIAL-MICRO]  28.32,172.59 0 top
FD22  FIDUCIALUFIDUCIAL  [FIDUCIAL-MICRO]  28.32,172.59 0 bottom
FD23  FIDUCIALUFIDUCIAL  [FIDUCIAL-MICRO]  7.6,100.66 0 top
FD24  FIDUCIALUFIDUCIAL  [FIDUCIAL-MICRO]  7.6,100.66 0 bottom
FD25  FIDUCIALUFIDUCIAL  [FIDUCIAL-MICRO]  51.69,172.59 0 top
FD26  FIDUCIALUFIDUCIAL  [FIDUCIAL-MICRO]  51.69,172.59 0 bottom
FD27  FIDUCIALUFIDUCIAL  [FIDUCIAL-MICRO]  30.97,100.66 0 top
FD28  FIDUCIALUFIDUCIAL  [FIDUCIAL-MICRO]  30.97,100.66 0 bottom
FD29  FIDUCIALUFIDUCIAL  [FIDUCIAL-MICRO]  75.06,172.59 0 top
FD30  FIDUCIALUFIDUCIAL  [FIDUCIAL-MICRO]  75.06,172.59 0 bottom
FD31  FIDUCIALUFIDUCIAL  [FIDUCIAL-MICRO]  54.34,100.66 0 top
FD32  FIDUCIALUFIDUCIAL  [FIDUCIAL-MICRO]  54.34,100.66 0 bottom
FD33  FIDUCIALUFIDUCIAL  [FIDUCIAL-MICRO]  98.42,172.59 0 top
FD34  FIDUCIALUFIDUCIAL  [FIDUCIAL-MICRO]  98.42,172.59 0 bottom
FD35  FIDUCIALUFIDUCIAL  [FIDUCIAL-MICRO]  77.71,100.66 0 top
FD36  FIDUCIALUFIDUCIAL  [FIDUCIAL-MICRO]  77.71,100.66 0 bottom
FD37  FIDUCIALUFIDUCIAL  [FIDUCIAL-MICRO]  121.79,172.59 0 top
FD38  FIDUCIALUFIDUCIAL  [FIDUCIAL-MICRO]  121.79,172.59 0 bottom
FD39  FIDUCIALUFIDUCIAL  [FIDUCIAL-MICRO]  101.07,100.66 0 top
FD40  FIDUCIALUFIDUCIAL  [FIDUCIAL-MICRO]  101.07,100.66 0 bottom
H1  STAND-OFF  [STAND-OFF]  9.4,15.24 0 top
H2  STAND-OFF  [STAND-OFF]  27.18,15.24 0 top
H3  STAND-OFF  [STAND-OFF]  32.77,15.24 0 top
H4  STAND-OFF  [STAND-OFF]  50.55,15.24 0 top
H5  STAND-OFF  [STAND-OFF]  56.13,15.24 0 top
H6  STAND-OFF  [STAND-OFF]  73.91,15.24 0 top
H7  STAND-OFF  [STAND-OFF]  79.5,15.24 0 top
H8  STAND-OFF  [STAND-OFF]  97.28,15.24 0 top
H9  STAND-OFF  [STAND-OFF]  102.87,15.24 0 top
H10  STAND-OFF  [STAND-OFF]  120.65,15.24 0 top
H11  STAND-OFF  [STAND-OFF]  9.4,99.06 0 top
H12  STAND-OFF  [STAND-OFF]  27.18,99.06 0 top
H13  STAND-OFF  [STAND-OFF]  32.77,99.06 0 top
H14  STAND-OFF  [STAND-OFF]  50.55,99.06 0 top
H15  STAND-OFF  [STAND-OFF]  56.13,99.06 0 top
H16  STAND-OFF  [STAND-OFF]  73.91,99.06 0 top
H17  STAND-OFF  [STAND-OFF]  79.5,99.06 0 top
H18  STAND-OFF  [STAND-OFF]  97.28,99.06 0 top
H19  STAND-OFF  [STAND-OFF]  102.87,99.06 0 top
H20  STAND-OFF  [STAND-OFF]  120.65,99.06 0 top
J1  THING_PLUS  [THING_PLUS]  6.86,12.7 0 top
J2  LiPo  [JST-2-SMD]  10.34,30.48 90 top
J3  QWIIC_RA  [JST04_1MM_RA]  11.94,22.1 270 top
J4  LiPo  [JST-2-SMD]  33.71,30.48 90 top
J5  USB-C  [USB-C-16P-4LAYER-ISOLATED]  18.29,19.3 0 top
J6  [1X05_NO_SILK]  28.45,69.85 90 top
J7  [1X05_NO_SILK]  8.13,80.01 270 top
J8  QWIIC_RA  [JST04_1MM_RA]  35.31,22.1 270 top
J9  USB-C  [USB-C-16P-4LAYER-ISOLATED]  41.66,19.3 0 top
J10  THING_PLUS  [THING_PLUS]  30.23,12.7 0 top
J11  [1X05_NO_SILK]  51.82,69.85 90 top
J12  [1X05_NO_SILK]  31.5,80.01 270 top
J13  LiPo  [JST-2-SMD]  57.07,30.48 90 top
J14  QWIIC_RA  [JST04_1MM_RA]  58.67,22.1 270 top
J15  USB-C  [USB-C-16P-4LAYER-ISOLATED]  65.02,19.3 0 top
J16  THING_PLUS  [THING_PLUS]  53.59,12.7 0 top
J17  [1X05_NO_SILK]  75.18,69.85 90 top
J18  [1X05_NO_SILK]  54.86,80.01 270 top
J19  LiPo  [JST-2-SMD]  80.44,30.48 90 top
J20  QWIIC_RA  [JST04_1MM_RA]  82.04,22.1 270 top
J21  USB-C  [USB-C-16P-4LAYER-ISOLATED]  88.39,19.3 0 top
J22  THING_PLUS  [THING_PLUS]  76.96,12.7 0 top
J23  [1X05_NO_SILK]  98.55,69.85 90 top
J24  [1X05_NO_SILK]  78.23,80.01 270 top
J25  LiPo  [JST-2-SMD]  103.81,30.48 90 top
J26  QWIIC_RA  [JST04_1MM_RA]  105.41,22.1 270 top
J27  USB-C  [USB-C-16P-4LAYER-ISOLATED]  111.76,19.3 0 top
J28  THING_PLUS  [THING_PLUS]  100.33,12.7 0 top
J29  [1X05_NO_SILK]  121.92,69.85 90 top
J30  [1X05_NO_SILK]  101.6,80.01 270 top
J31  LiPo  [JST-2-SMD]  10.34,114.3 90 top
J32  QWIIC_RA  [JST04_1MM_RA]  11.94,105.92 270 top
J33  USB-C  [USB-C-16P-4LAYER-ISOLATED]  18.29,103.12 0 top
J34  THING_PLUS  [THING_PLUS]  6.86,96.52 0 top
J35  [1X05_NO_SILK]  28.45,153.67 90 top
J36  [1X05_NO_SILK]  8.13,163.83 270 top
J37  LiPo  [JST-2-SMD]  33.71,114.3 90 top
J38  QWIIC_RA  [JST04_1MM_RA]  35.31,105.92 270 top
J39  USB-C  [USB-C-16P-4LAYER-ISOLATED]  41.66,103.12 0 top
J40  THING_PLUS  [THING_PLUS]  30.23,96.52 0 top
J41  [1X05_NO_SILK]  51.82,153.67 90 top
J42  [1X05_NO_SILK]  31.5,163.83 270 top
J43  LiPo  [JST-2-SMD]  57.07,114.3 90 top
J44  QWIIC_RA  [JST04_1MM_RA]  58.67,105.92 270 top
J45  USB-C  [USB-C-16P-4LAYER-ISOLATED]  65.02,103.12 0 top
J46  THING_PLUS  [THING_PLUS]  53.59,96.52 0 top
J47  [1X05_NO_SILK]  75.18,153.67 90 top
J48  [1X05_NO_SILK]  54.86,163.83 270 top
J49  LiPo  [JST-2-SMD]  80.44,114.3 90 top
J50  QWIIC_RA  [JST04_1MM_RA]  82.04,105.92 270 top
J51  USB-C  [USB-C-16P-4LAYER-ISOLATED]  88.39,103.12 0 top
J52  THING_PLUS  [THING_PLUS]  76.96,96.52 0 top
J53  [1X05_NO_SILK]  98.55,153.67 90 top
J54  [1X05_NO_SILK]  78.23,163.83 270 top
J55  LiPo  [JST-2-SMD]  103.81,114.3 90 top
J56  QWIIC_RA  [JST04_1MM_RA]  105.41,105.92 270 top
J57  USB-C  [USB-C-16P-4LAYER-ISOLATED]  111.76,103.12 0 top
J58  THING_PLUS  [THING_PLUS]  100.33,96.52 0 top
J59  [1X05_NO_SILK]  121.92,153.67 90 top
J60  [1X05_NO_SILK]  101.6,163.83 270 top
JP1  [SMT-JUMPER_2_NC_TRACE_SILK]  25.5,31.25 0 bottom
JP2  [SMT-JUMPER_2_NC_TRACE_SILK]  22.4,34.41 0 bottom
JP3  [SMT-JUMPER_2_NC_TRACE_SILK]  48.87,31.25 0 bottom
JP4  [SMT-JUMPER_2_NC_TRACE_SILK]  45.76,34.41 0 bottom
JP5  [SMT-JUMPER_2_NC_TRACE_SILK]  72.24,31.25 0 bottom
JP6  [SMT-JUMPER_2_NC_TRACE_SILK]  69.13,34.41 0 bottom
JP7  [SMT-JUMPER_2_NC_TRACE_SILK]  95.6,31.25 0 bottom
JP8  [SMT-JUMPER_2_NC_TRACE_SILK]  92.5,34.41 0 bottom
JP9  [SMT-JUMPER_2_NC_TRACE_SILK]  118.97,31.25 0 bottom
JP10  [SMT-JUMPER_2_NC_TRACE_SILK]  115.87,34.41 0 bottom
JP11  [SMT-JUMPER_2_NC_TRACE_SILK]  25.5,115.07 0 bottom
JP12  [SMT-JUMPER_2_NC_TRACE_SILK]  22.4,118.23 0 bottom
JP13  [SMT-JUMPER_2_NC_TRACE_SILK]  48.87,115.07 0 bottom
JP14  [SMT-JUMPER_2_NC_TRACE_SILK]  45.76,118.23 0 bottom
JP15  [SMT-JUMPER_2_NC_TRACE_SILK]  72.24,115.07 0 bottom
JP16  [SMT-JUMPER_2_NC_TRACE_SILK]  69.13,118.23 0 bottom
JP17  [SMT-JUMPER_2_NC_TRACE_SILK]  95.6,115.07 0 bottom
JP18  [SMT-JUMPER_2_NC_TRACE_SILK]  92.5,118.23 0 bottom
JP19  [SMT-JUMPER_2_NC_TRACE_SILK]  118.97,115.07 0 bottom
JP20  [SMT-JUMPER_2_NC_TRACE_SILK]  115.87,118.23 0 bottom
LED  [SMT-JUMPER_2_NC_TRACE_SILK]  19.19,41.44 180 bottom
LED1  [SMT-JUMPER_2_NC_TRACE_SILK]  42.56,41.44 180 bottom
LED2  [SMT-JUMPER_2_NC_TRACE_SILK]  65.93,41.44 180 bottom
LED3  [SMT-JUMPER_2_NC_TRACE_SILK]  89.3,41.44 180 bottom
LED4  [SMT-JUMPER_2_NC_TRACE_SILK]  112.67,41.44 180 bottom
LED5  [SMT-JUMPER_2_NC_TRACE_SILK]  19.19,125.26 180 bottom
LED6  [SMT-JUMPER_2_NC_TRACE_SILK]  42.56,125.26 180 bottom
LED7  [SMT-JUMPER_2_NC_TRACE_SILK]  65.93,125.26 180 bottom
LED8  [SMT-JUMPER_2_NC_TRACE_SILK]  89.3,125.26 180 bottom
LED9  [SMT-JUMPER_2_NC_TRACE_SILK]  112.67,125.26 180 bottom
LOGO1  SFE_LOGO_NAME.1_INCH  [SFE_LOGO_NAME_.1]  18.29,49.53 0 top
LOGO2  OSHW-LOGOMINI  [OSHW-LOGO-MINI]  18.29,22.74 0 bottom
LOGO3  SFE_LOGO_NAME_FLAME.1_INCH  [SFE_LOGO_NAME_FLAME_.1]  18.29,83.82 0 bottom
LOGO4  FOUR_LAYER_WARNING  [FOUR_LAYER_WARNING]  37.34,52.07 0 top
LOGO5  OSHW-LOGOMINI  [OSHW-LOGO-MINI]  41.66,22.74 0 bottom
LOGO6  QWIIC_LOGO_4MM  [QWIIC_4MM]  11.36,18.37 0 top
LOGO7  FOUR_LAYER_WARNING  [FOUR_LAYER_WARNING]  60.71,52.07 0 top
LOGO8  QWIIC_LOGO_4MM  [QWIIC_4MM]  34.73,18.37 0 top
LOGO9  SFE_LOGO_NAME.1_INCH  [SFE_LOGO_NAME_.1]  41.66,49.53 0 top
LOGO10  SFE_LOGO_NAME_FLAME.1_INCH  [SFE_LOGO_NAME_FLAME_.1]  41.66,83.82 0 bottom
LOGO11  OSHW-LOGOMINI  [OSHW-LOGO-MINI]  65.02,22.74 0 bottom
LOGO12  FOUR_LAYER_WARNING  [FOUR_LAYER_WARNING]  84.07,52.07 0 top
LOGO13  QWIIC_LOGO_4MM  [QWIIC_4MM]  58.1,18.37 0 top
LOGO14  SFE_LOGO_NAME.1_INCH  [SFE_LOGO_NAME_.1]  65.02,49.53 0 top
LOGO15  SFE_LOGO_NAME_FLAME.1_INCH  [SFE_LOGO_NAME_FLAME_.1]  65.02,83.82 0 bottom
LOGO16  OSHW-LOGOMINI  [OSHW-LOGO-MINI]  88.39,22.74 0 bottom
LOGO17  FOUR_LAYER_WARNING  [FOUR_LAYER_WARNING]  107.44,52.07 0 top
LOGO18  QWIIC_LOGO_4MM  [QWIIC_4MM]  81.47,18.37 0 top
LOGO19  SFE_LOGO_NAME.1_INCH  [SFE_LOGO_NAME_.1]  88.39,49.53 0 top
LOGO20  SFE_LOGO_NAME_FLAME.1_INCH  [SFE_LOGO_NAME_FLAME_.1]  88.39,83.82 0 bottom
LOGO21  OSHW-LOGOMINI  [OSHW-LOGO-MINI]  111.76,22.74 0 bottom
LOGO22  FOUR_LAYER_WARNING  [FOUR_LAYER_WARNING]  130.81,52.07 0 top
LOGO23  QWIIC_LOGO_4MM  [QWIIC_4MM]  104.83,18.37 0 top
LOGO24  SFE_LOGO_NAME.1_INCH  [SFE_LOGO_NAME_.1]  111.76,49.53 0 top
LOGO25  SFE_LOGO_NAME_FLAME.1_INCH  [SFE_LOGO_NAME_FLAME_.1]  111.76,83.82 0 bottom
LOGO26  OSHW-LOGOMINI  [OSHW-LOGO-MINI]  18.29,106.56 0 bottom
LOGO27  FOUR_LAYER_WARNING  [FOUR_LAYER_WARNING]  37.34,135.89 0 top
LOGO28  QWIIC_LOGO_4MM  [QWIIC_4MM]  11.36,102.19 0 top
LOGO29  SFE_LOGO_NAME.1_INCH  [SFE_LOGO_NAME_.1]  18.29,133.35 0 top
LOGO30  SFE_LOGO_NAME_FLAME.1_INCH  [SFE_LOGO_NAME_FLAME_.1]  18.29,167.64 0 bottom
LOGO31  OSHW-LOGOMINI  [OSHW-LOGO-MINI]  41.66,106.56 0 bottom
LOGO32  FOUR_LAYER_WARNING  [FOUR_LAYER_WARNING]  60.71,135.89 0 top
LOGO33  QWIIC_LOGO_4MM  [QWIIC_4MM]  34.73,102.19 0 top
LOGO34  SFE_LOGO_NAME.1_INCH  [SFE_LOGO_NAME_.1]  41.66,133.35 0 top
LOGO35  SFE_LOGO_NAME_FLAME.1_INCH  [SFE_LOGO_NAME_FLAME_.1]  41.66,167.64 0 bottom
LOGO36  OSHW-LOGOMINI  [OSHW-LOGO-MINI]  65.02,106.56 0 bottom
LOGO37  FOUR_LAYER_WARNING  [FOUR_LAYER_WARNING]  84.07,135.89 0 top
LOGO38  QWIIC_LOGO_4MM  [QWIIC_4MM]  58.1,102.19 0 top
LOGO39  SFE_LOGO_NAME.1_INCH  [SFE_LOGO_NAME_.1]  65.02,133.35 0 top
LOGO40  SFE_LOGO_NAME_FLAME.1_INCH  [SFE_LOGO_NAME_FLAME_.1]  65.02,167.64 0 bottom
LOGO41  OSHW-LOGOMINI  [OSHW-LOGO-MINI]  88.39,106.56 0 bottom
LOGO42  FOUR_LAYER_WARNING  [FOUR_LAYER_WARNING]  107.44,135.89 0 top
LOGO43  QWIIC_LOGO_4MM  [QWIIC_4MM]  81.47,102.19 0 top
LOGO44  SFE_LOGO_NAME.1_INCH  [SFE_LOGO_NAME_.1]  88.39,133.35 0 top
LOGO45  SFE_LOGO_NAME_FLAME.1_INCH  [SFE_LOGO_NAME_FLAME_.1]  88.39,167.64 0 bottom
LOGO46  OSHW-LOGOMINI  [OSHW-LOGO-MINI]  111.76,106.56 0 bottom
LOGO47  FOUR_LAYER_WARNING  [FOUR_LAYER_WARNING]  130.81,135.89 0 top
LOGO48  QWIIC_LOGO_4MM  [QWIIC_4MM]  104.83,102.19 0 top
LOGO49  SFE_LOGO_NAME.1_INCH  [SFE_LOGO_NAME_.1]  111.76,133.35 0 top
LOGO50  SFE_LOGO_NAME_FLAME.1_INCH  [SFE_LOGO_NAME_FLAME_.1]  111.76,167.64 0 bottom
Q1  3.1A/30V/105mΩ  [SOT23-3]  18.92,33.66 90 top
Q2  MBT3904DW1T1  [SC70-6]  24.43,34.68 270 top
Q3  3.1A/30V/105mΩ  [SOT23-3]  42.29,33.66 90 top
Q4  MBT3904DW1T1  [SC70-6]  47.8,34.68 270 top
Q5  3.1A/30V/105mΩ  [SOT23-3]  65.66,33.66 90 top
Q6  MBT3904DW1T1  [SC70-6]  71.17,34.68 270 top
Q7  3.1A/30V/105mΩ  [SOT23-3]  89.03,33.66 90 top
Q8  MBT3904DW1T1  [SC70-6]  94.54,34.68 270 top
Q9  3.1A/30V/105mΩ  [SOT23-3]  112.4,33.66 90 top
Q10  MBT3904DW1T1  [SC70-6]  117.9,34.68 270 top
Q11  3.1A/30V/105mΩ  [SOT23-3]  18.92,117.48 90 top
Q12  MBT3904DW1T1  [SC70-6]  24.43,118.5 270 top
Q13  3.1A/30V/105mΩ  [SOT23-3]  42.29,117.48 90 top
Q14  MBT3904DW1T1  [SC70-6]  47.8,118.5 270 top
Q15  3.1A/30V/105mΩ  [SOT23-3]  65.66,117.48 90 top
Q16  MBT3904DW1T1  [SC70-6]  71.17,118.5 270 top
Q17  3.1A/30V/105mΩ  [SOT23-3]  89.03,117.48 90 top
Q18  MBT3904DW1T1  [SC70-6]  94.54,118.5 270 top
Q19  3.1A/30V/105mΩ  [SOT23-3]  112.4,117.48 90 top
Q20  MBT3904DW1T1  [SC70-6]  117.9,118.5 270 top
R1  10k  [0402-TIGHT]  26.44,29.05 270 top
R2  1k  [0402-TIGHT]  23.11,42.29 0 top
R3  4.7k  [0402-TIGHT]  26.25,18.86 0 top
R4  4.7k  [0402-TIGHT]  10.6,42.77 270 top
R5  22k  [0402-TIGHT]  26.69,25.71 90 top
R6  2.0k  [0603]  17.15,37.53 180 top
R7  10k  [0402-TIGHT]  21.17,36.27 270 top
R8  100k  [0402-TIGHT]  9.98,37.21 270 top
R9  33k  [0402-TIGHT]  27.2,24.05 180 top
R10  100  [0402-TIGHT]  21.17,34.2 270 top
R11  5.1k  [0402-TIGHT]  21.03,21.39 270 top
R12  5.1k  [0402-TIGHT]  17.14,26.79 270 top
R13  10k  [0402-TIGHT]  17.12,35.84 0 top
R14  10k  [0402-TIGHT]  44.54,36.27 270 top
R15  1k  [0402-TIGHT]  16,26.8 270 top
R16  4.7k  [0402-TIGHT]  49.62,18.86 0 top
R17  10k  [0402-TIGHT]  23.47,37.83 0 top
R18  10k  [0402-TIGHT]  23.49,36.72 180 top
R19  2.0k  [0603]  40.52,37.53 180 top
R20  10k  [0402-TIGHT]  49.81,29.05 270 top
R21  4.7k  [0402-TIGHT]  33.97,42.77 270 top
R22  100k  [0402-TIGHT]  33.35,37.21 270 top
R23  22k  [0402-TIGHT]  50.06,25.71 90 top
R24  33k  [0402-TIGHT]  50.56,24.05 180 top
R25  5.1k  [0402-TIGHT]  44.4,21.39 270 top
R26  5.1k  [0402-TIGHT]  40.51,26.79 270 top
R27  10k  [0402-TIGHT]  40.49,35.84 0 top
R28  100  [0402-TIGHT]  44.54,34.2 270 top
R29  1k  [0402-TIGHT]  39.37,26.8 270 top
R30  10k  [0402-TIGHT]  46.84,37.83 0 top
R31  10k  [0402-TIGHT]  46.86,36.72 180 top
R32  1k  [0402-TIGHT]  46.48,42.29 0 top
R33  10k  [0402-TIGHT]  67.9,36.27 270 top
R34  4.7k  [0402-TIGHT]  72.98,18.86 0 top
R35  2.0k  [0603]  63.89,37.53 180 top
R36  10k  [0402-TIGHT]  73.18,29.05 270 top
R37  4.7k  [0402-TIGHT]  57.34,42.77 270 top
R38  100k  [0402-TIGHT]  56.72,37.21 270 top
R39  22k  [0402-TIGHT]  73.43,25.71 90 top
R40  33k  [0402-TIGHT]  73.93,24.05 180 top
R41  5.1k  [0402-TIGHT]  67.77,21.39 270 top
R42  5.1k  [0402-TIGHT]  63.87,26.79 270 top
R43  10k  [0402-TIGHT]  63.86,35.84 0 top
R44  100  [0402-TIGHT]  67.91,34.2 270 top
R45  1k  [0402-TIGHT]  62.74,26.8 270 top
R46  10k  [0402-TIGHT]  70.21,37.83 0 top
R47  10k  [0402-TIGHT]  70.22,36.72 180 top
R48  1k  [0402-TIGHT]  69.85,42.29 0 top
R49  10k  [0402-TIGHT]  91.27,36.27 270 top
R50  4.7k  [0402-TIGHT]  96.35,18.86 0 top
R51  2.0k  [0603]  87.26,37.53 180 top
R52  10k  [0402-TIGHT]  96.55,29.05 270 top
R53  4.7k  [0402-TIGHT]  80.71,42.77 270 top
R54  100k  [0402-TIGHT]  80.09,37.21 270 top
R55  22k  [0402-TIGHT]  96.79,25.71 90 top
R56  33k  [0402-TIGHT]  97.3,24.05 180 top
R57  5.1k  [0402-TIGHT]  91.14,21.39 270 top
R58  5.1k  [0402-TIGHT]  87.24,26.79 270 top
R59  10k  [0402-TIGHT]  87.22,35.84 0 top
R60  100  [0402-TIGHT]  91.28,34.2 270 top
R61  1k  [0402-TIGHT]  86.11,26.8 270 top
R62  10k  [0402-TIGHT]  93.57,37.83 0 top
R63  10k  [0402-TIGHT]  93.59,36.72 180 top
R64  1k  [0402-TIGHT]  93.22,42.29 0 top
R65  10k  [0402-TIGHT]  114.64,36.27 270 top
R66  4.7k  [0402-TIGHT]  119.72,18.86 0 top
R67  2.0k  [0603]  110.62,37.53 180 top
R68  10k  [0402-TIGHT]  119.91,29.05 270 top
R69  4.7k  [0402-TIGHT]  104.08,42.77 270 top
R70  100k  [0402-TIGHT]  103.45,37.21 270 top
R71  22k  [0402-TIGHT]  120.16,25.71 90 top
R72  33k  [0402-TIGHT]  120.67,24.05 180 top
R73  5.1k  [0402-TIGHT]  114.5,21.39 270 top
R74  5.1k  [0402-TIGHT]  110.61,26.79 270 top
R75  10k  [0402-TIGHT]  110.59,35.84 0 top
R76  100  [0402-TIGHT]  114.65,34.2 270 top
R77  1k  [0402-TIGHT]  109.47,26.8 270 top
R78  10k  [0402-TIGHT]  116.94,37.83 0 top
R79  10k  [0402-TIGHT]  116.96,36.72 180 top
R80  1k  [0402-TIGHT]  116.59,42.29 0 top
R81  10k  [0402-TIGHT]  21.17,120.09 270 top
R82  4.7k  [0402-TIGHT]  26.25,102.68 0 top
R83  2.0k  [0603]  17.15,121.35 180 top
R84  10k  [0402-TIGHT]  26.44,112.87 270 top
R85  4.7k  [0402-TIGHT]  10.6,126.59 270 top
R86  100k  [0402-TIGHT]  9.98,121.03 270 top
R87  22k  [0402-TIGHT]  26.69,109.53 90 top
R88  33k  [0402-TIGHT]  27.2,107.87 180 top
R89  5.1k  [0402-TIGHT]  21.03,105.21 270 top
R90  5.1k  [0402-TIGHT]  17.14,110.61 270 top
R91  10k  [0402-TIGHT]  17.12,119.66 0 top
R92  100  [0402-TIGHT]  21.17,118.02 270 top
R93  1k  [0402-TIGHT]  16,110.62 270 top
R94  10k  [0402-TIGHT]  23.47,121.65 0 top
R95  10k  [0402-TIGHT]  23.49,120.54 180 top
R96  1k  [0402-TIGHT]  23.11,126.11 0 top
R97  10k  [0402-TIGHT]  44.54,120.09 270 top
R98  4.7k  [0402-TIGHT]  49.62,102.68 0 top
R99  2.0k  [0603]  40.52,121.35 180 top
R100  10k  [0402-TIGHT]  49.81,112.87 270 top
R101  4.7k  [0402-TIGHT]  33.97,126.59 270 top
R102  100k  [0402-TIGHT]  33.35,121.03 270 top
R103  22k  [0402-TIGHT]  50.06,109.53 90 top
R104  33k  [0402-TIGHT]  50.56,107.87 180 top
R105  5.1k  [0402-TIGHT]  44.4,105.21 270 top
R106  5.1k  [0402-TIGHT]  40.51,110.61 270 top
R107  10k  [0402-TIGHT]  40.49,119.66 0 top
R108  100  [0402-TIGHT]  44.54,118.02 270 top
R109  1k  [0402-TIGHT]  39.37,110.62 270 top
R110  10k  [0402-TIGHT]  46.84,121.65 0 top
R111  10k  [0402-TIGHT]  46.86,120.54 180 top
R112  1k  [0402-TIGHT]  46.48,126.11 0 top
R113  10k  [0402-TIGHT]  67.9,120.09 270 top
R114  4.7k  [0402-TIGHT]  72.98,102.68 0 top
R115  2.0k  [0603]  63.89,121.35 180 top
R116  10k  [0402-TIGHT]  73.18,112.87 270 top
R117  4.7k  [0402-TIGHT]  57.34,126.59 270 top
R118  100k  [0402-TIGHT]  56.72,121.03 270 top
R119  22k  [0402-TIGHT]  73.43,109.53 90 top
R120  33k  [0402-TIGHT]  73.93,107.87 180 top
R121  5.1k  [0402-TIGHT]  67.77,105.21 270 top
R122  5.1k  [0402-TIGHT]  63.87,110.61 270 top
R123  10k  [0402-TIGHT]  63.86,119.66 0 top
R124  100  [0402-TIGHT]  67.91,118.02 270 top
R125  1k  [0402-TIGHT]  62.74,110.62 270 top
R126  10k  [0402-TIGHT]  70.21,121.65 0 top
R127  10k  [0402-TIGHT]  70.22,120.54 180 top
R128  1k  [0402-TIGHT]  69.85,126.11 0 top
R129  10k  [0402-TIGHT]  91.27,120.09 270 top
R130  4.7k  [0402-TIGHT]  96.35,102.68 0 top
R131  2.0k  [0603]  87.26,121.35 180 top
R132  10k  [0402-TIGHT]  96.55,112.87 270 top
R133  4.7k  [0402-TIGHT]  80.71,126.59 270 top
R134  100k  [0402-TIGHT]  80.09,121.03 270 top
R135  22k  [0402-TIGHT]  96.79,109.53 90 top
R136  33k  [0402-TIGHT]  97.3,107.87 180 top
R137  5.1k  [0402-TIGHT]  91.14,105.21 270 top
R138  5.1k  [0402-TIGHT]  87.24,110.61 270 top
R139  10k  [0402-TIGHT]  87.22,119.66 0 top
R140  100  [0402-TIGHT]  91.28,118.02 270 top
R141  1k  [0402-TIGHT]  86.11,110.62 270 top
R142  10k  [0402-TIGHT]  93.57,121.65 0 top
R143  10k  [0402-TIGHT]  93.59,120.54 180 top
R144  1k  [0402-TIGHT]  93.22,126.11 0 top
R145  10k  [0402-TIGHT]  114.64,120.09 270 top
R146  4.7k  [0402-TIGHT]  119.72,102.68 0 top
R147  2.0k  [0603]  110.62,121.35 180 top
R148  10k  [0402-TIGHT]  119.91,112.87 270 top
R149  4.7k  [0402-TIGHT]  104.08,126.59 270 top
R150  100k  [0402-TIGHT]  103.45,121.03 270 top
R151  22k  [0402-TIGHT]  120.16,109.53 90 top
R152  33k  [0402-TIGHT]  120.67,107.87 180 top
R153  5.1k  [0402-TIGHT]  114.5,105.21 270 top
R154  5.1k  [0402-TIGHT]  110.61,110.61 270 top
R155  10k  [0402-TIGHT]  110.59,119.66 0 top
R156  100  [0402-TIGHT]  114.65,118.02 270 top
R157  1k  [0402-TIGHT]  109.47,110.62 270 top
R158  10k  [0402-TIGHT]  116.94,121.65 0 top
R159  10k  [0402-TIGHT]  116.96,120.54 180 top
R160  1k  [0402-TIGHT]  116.59,126.11 0 top
S1  SW1/RESET  [TACTILE_SWITCH_SMD_4.6X2.8MM]  23.57,23.11 270 top
S2  SW2/BOOT  [TACTILE_SWITCH_SMD_4.6X2.8MM]  14.64,23.11 270 top
S3  SW1/RESET  [TACTILE_SWITCH_SMD_4.6X2.8MM]  46.94,23.11 270 top
S4  SW2/BOOT  [TACTILE_SWITCH_SMD_4.6X2.8MM]  38.01,23.11 270 top
S5  SW1/RESET  [TACTILE_SWITCH_SMD_4.6X2.8MM]  70.31,23.11 270 top
S6  SW2/BOOT  [TACTILE_SWITCH_SMD_4.6X2.8MM]  61.37,23.11 270 top
S7  SW1/RESET  [TACTILE_SWITCH_SMD_4.6X2.8MM]  93.68,23.11 270 top
S8  SW2/BOOT  [TACTILE_SWITCH_SMD_4.6X2.8MM]  84.74,23.11 270 top
S9  SW1/RESET  [TACTILE_SWITCH_SMD_4.6X2.8MM]  117.04,23.11 270 top
S10  SW2/BOOT  [TACTILE_SWITCH_SMD_4.6X2.8MM]  108.11,23.11 270 top
S11  SW1/RESET  [TACTILE_SWITCH_SMD_4.6X2.8MM]  23.57,106.93 270 top
S12  SW2/BOOT  [TACTILE_SWITCH_SMD_4.6X2.8MM]  14.64,106.93 270 top
S13  SW1/RESET  [TACTILE_SWITCH_SMD_4.6X2.8MM]  46.94,106.93 270 top
S14  SW2/BOOT  [TACTILE_SWITCH_SMD_4.6X2.8MM]  38.01,106.93 270 top
S15  SW1/RESET  [TACTILE_SWITCH_SMD_4.6X2.8MM]  70.31,106.93 270 top
S16  SW2/BOOT  [TACTILE_SWITCH_SMD_4.6X2.8MM]  61.37,106.93 270 top
S17  SW1/RESET  [TACTILE_SWITCH_SMD_4.6X2.8MM]  93.68,106.93 270 top
S18  SW2/BOOT  [TACTILE_SWITCH_SMD_4.6X2.8MM]  84.74,106.93 270 top
S19  SW1/RESET  [TACTILE_SWITCH_SMD_4.6X2.8MM]  117.04,106.93 270 top
S20  SW2/BOOT  [TACTILE_SWITCH_SMD_4.6X2.8MM]  108.11,106.93 270 top
U1  AW-CU488  [LGA150_AW-CU488]  18.29,69.85 270 top
U2  CP210X  [QFN24]  23,29.11 0 top
U3  XC6222B331MR-G  [SOT23-5]  12.73,37.44 270 top
U4  MCP73831  [SOT23-5]  19.56,40 90 top
U5  MCP73831  [SOT23-5]  42.93,40 90 top
U6  XC6222B331MR-G  [SOT23-5]  36.09,37.44 270 top
U7  CP210X  [QFN24]  46.37,29.11 0 top
U8  AW-CU488  [LGA150_AW-CU488]  41.66,69.85 270 top
U9  MCP73831  [SOT23-5]  66.29,40 90 top
U10  XC6222B331MR-G  [SOT23-5]  59.46,37.44 270 top
U11  CP210X  [QFN24]  69.73,29.11 0 top
U12  AW-CU488  [LGA150_AW-CU488]  65.02,69.85 270 top
U13  MCP73831  [SOT23-5]  89.66,40 90 top
U14  XC6222B331MR-G  [SOT23-5]  82.83,37.44 270 top
U15  CP210X  [QFN24]  93.1,29.11 0 top
U16  AW-CU488  [LGA150_AW-CU488]  88.39,69.85 270 top
U17  MCP73831  [SOT23-5]  113.03,40 90 top
U18  XC6222B331MR-G  [SOT23-5]  106.2,37.44 270 top
U19  CP210X  [QFN24]  116.47,29.11 0 top
U20  AW-CU488  [LGA150_AW-CU488]  111.76,69.85 270 top
U21  MCP73831  [SOT23-5]  19.56,123.83 90 top
U22  XC6222B331MR-G  [SOT23-5]  12.73,121.26 270 top
U23  CP210X  [QFN24]  23,112.93 0 top
U24  AW-CU488  [LGA150_AW-CU488]  18.29,153.67 270 top
U25  MCP73831  [SOT23-5]  42.93,123.83 90 top
U26  XC6222B331MR-G  [SOT23-5]  36.09,121.26 270 top
U27  CP210X  [QFN24]  46.37,112.93 0 top
U28  AW-CU488  [LGA150_AW-CU488]  41.66,153.67 270 top
U29  MCP73831  [SOT23-5]  66.29,123.83 90 top
U30  XC6222B331MR-G  [SOT23-5]  59.46,121.26 270 top
U31  CP210X  [QFN24]  69.73,112.93 0 top
U32  AW-CU488  [LGA150_AW-CU488]  65.02,153.67 270 top
U33  MCP73831  [SOT23-5]  89.66,123.83 90 top
U34  XC6222B331MR-G  [SOT23-5]  82.83,121.26 270 top
U35  CP210X  [QFN24]  93.1,112.93 0 top
U36  AW-CU488  [LGA150_AW-CU488]  88.39,153.67 270 top
U37  MCP73831  [SOT23-5]  113.03,123.83 90 top
U38  XC6222B331MR-G  [SOT23-5]  106.2,121.26 270 top
U39  CP210X  [QFN24]  116.47,112.93 0 top
U40  AW-CU488  [LGA150_AW-CU488]  111.76,153.67 270 top
U$1  [#10#30]  10.08,52.06 0 top
U$2  [BOOT0]  16.64,23.22 90 top
U$3  [CHG0]  18.85,37.79 90 bottom
U$4  [#500#0]  15.89,36.44 90 bottom
U$5  [#11#30]  9.95,49.54 0 top
U$6  [AZUREWAVE0]  18.38,47.46 0 top
U$7  [1330]  12.15,41.41 0 top
U$8  [AZUREWAVE0]  18.29,72.39 0 bottom
U$9  [AW#CU488_0]  18.31,69.28 0 bottom
U$10  [THING_PLUS_0]  18.09,70.88 0 bottom
U$11  [MA0]  17.76,37.86 90 bottom
U$12  [#12#30]  10.07,47 0 top
U$13  [ORDERING_INSTRUCTIONS]  59.44,63.5 0 top
U$14  [#13#30]  10.06,44.44 0 top
U$15  [#JP1#1]  22.79,31.26 0 bottom
U$16  [#0#1]  26.86,52.07 0 top
U$17  [CHG0]  52.03,21.71 90 top
U$18  [#A0#30]  26.31,36.83 0 top
U$19  [#JP2#4]  19.53,34.35 0 bottom
U$20  [#USBSHLD#GND#3]  19.43,16.13 0 bottom
U$21  [RESET0]  48.92,23.13 90 top
U$22  [#VUSB#0]  31.72,41.91 0 bottom
U$23  [PWR0]  22.7,40.01 90 top
U$24  [#VBAT#0]  31.72,36.83 0 bottom
U$25  [#EN#0]  31.72,39.37 0 bottom
U$26  [#GND#0]  51.6,34.3 0 bottom
U$27  [AW#CU488_0]  18.3,44.32 0 top
U$28  [#3V3#0]  51.6,29.22 0 bottom
U$29  [#LED#0]  19.18,44.15 90 bottom
U$30  [##RESET##0]  51.6,26.68 0 bottom
U$31  [CHG0]  42.22,37.79 90 bottom
U$32  [#GND#0]  28.23,34.3 0 bottom
U$33  [MA0]  41.13,37.86 90 bottom
U$34  [#100#0]  39.26,39.11 90 bottom
U$35  [#500#0]  39.25,36.44 90 bottom
U$36  [THING_PLUS_0]  41.62,45.93 0 top
U$37  [AW#CU488_0]  41.67,44.32 0 top
U$38  [BOOT0]  40,23.22 90 top
U$39  [AZUREWAVE0]  41.75,47.46 0 top
U$40  [AZUREWAVE0]  41.66,72.39 0 bottom
U$41  [#VUSB#0]  8.36,41.91 0 bottom
U$42  [#VBAT#0]  8.36,36.83 0 bottom
U$43  [#EN#0]  8.36,39.37 0 bottom
U$44  [AW#CU488_0]  41.68,69.28 0 bottom
U$45  [#3V3#0]  28.23,29.22 0 bottom
U$46  [##RESET##0]  28.23,26.68 0 bottom
U$47  [THING_PLUS_0]  41.46,70.88 0 bottom
U$48  [#4#TX1#14]  24.99,62.22 0 bottom
U$49  [#3#RX1#14]  25.06,59.69 0 bottom
U$50  [#2#POCI#14]  24.67,57.13 0 bottom
U$51  [#A1#6]  49.73,39.34 0 top
U$52  [#A2#6]  49.64,41.87 0 top
U$53  [#A1#6]  26.36,39.34 0 top
U$54  [#A2#6]  26.27,41.87 0 top
U$55  [#A3#6]  26.28,44.4 0 top
U$56  [#A4#6]  26.28,46.96 0 top
U$57  [#A5#6]  26.32,49.57 0 top
U$58  [#A3#6]  49.65,44.4 0 top
U$59  [ORDERING_INSTRUCTIONS]  36.07,63.5 0 top
U$60  [#100#0]  15.89,39.11 90 bottom
U$61  [#A4#6]  49.64,46.96 0 top
U$62  [THING_PLUS_0]  18.25,45.93 0 top
U$63  [#A5#6]  49.69,49.57 0 top
U$64  [#1#PICO#14]  24.82,54.59 0 bottom
U$65  [#A0#30]  49.68,36.83 0 top
U$66  [#USBSHLD#GND#3]  42.8,16.13 0 bottom
U$67  [#13#14]  10.05,44.45 0 bottom
U$68  [#12#14]  10.07,47 0 bottom
U$69  [#11#14]  9.94,49.53 0 bottom
U$70  [#10#14]  10.07,52.07 0 bottom
U$71  [#9#A6#14]  11.13,54.61 0 bottom
U$72  [#8#CS#14]  11.1,57.15 0 bottom
U$73  [#7#14]  9.7,59.71 0 bottom
U$74  [#6#SCL#14]  11.52,62.26 0 bottom
U$75  [#5#SDA#14]  11.65,64.77 0 bottom
U$76  [#0#SCK#14]  25.01,52.07 0 bottom
U$77  [#14#A0#15]  25.09,36.81 0 bottom
U$78  [CHG0]  28.67,21.71 90 top
U$79  [RESET0]  25.55,23.13 90 top
U$80  [#15#A1#15]  25.23,39.35 0 bottom
U$81  [#16#A2#16]  25.1,41.9 0 bottom
U$82  [#17#A3#17]  25.08,44.44 0 bottom
U$83  [#18#A4#18]  25.08,46.98 0 bottom
U$84  [#19#A5#19]  25.12,49.52 0 bottom
U$85  [#20#20]  26.38,64.76 0 bottom
U$86  [#GND#0]  12.99,80.02 0 bottom
U$87  [#21#21]  26.49,69.8 0 bottom
U$88  [#22#22]  26.36,72.32 0 bottom
U$89  [#23#23]  26.34,74.88 0 bottom
U$90  [#24#TX#24]  24.82,77.42 0 bottom
U$91  [#25#RX#25]  24.95,79.98 0 bottom
U$92  [#26#26]  10.15,69.86 0 bottom
U$93  [#27#27]  10.15,72.4 0 bottom
U$94  [#28#28]  10.15,74.94 0 bottom
U$95  [#29#29]  10.15,77.48 0 bottom
U$96  [PWR0]  46.07,40.01 90 top
U$97  [#LED#0]  42.54,44.15 90 bottom
U$98  [#13#14]  33.42,44.45 0 bottom
U$99  [#12#14]  33.44,47 0 bottom
U$100  [#11#14]  33.31,49.53 0 bottom
U$101  [#10#14]  33.44,52.07 0 bottom
U$102  [#9#A6#14]  34.5,54.61 0 bottom
U$103  [#8#CS#14]  34.47,57.15 0 bottom
U$104  [#7#14]  33.07,59.71 0 bottom
U$105  [#6#SCL#14]  34.88,62.26 0 bottom
U$106  [#5#SDA#14]  35.01,64.77 0 bottom
U$107  [#4#TX1#14]  48.36,62.22 0 bottom
U$108  [#3#RX1#14]  48.43,59.69 0 bottom
U$109  [#2#POCI#14]  48.04,57.13 0 bottom
U$110  [#1#PICO#14]  48.19,54.59 0 bottom
U$111  [#0#SCK#14]  48.38,52.07 0 bottom
U$112  [#14#A0#15]  48.46,36.81 0 bottom
U$113  [#15#A1#15]  48.6,39.35 0 bottom
U$114  [#16#A2#16]  48.46,41.9 0 bottom
U$115  [#17#A3#17]  48.45,44.44 0 bottom
U$116  [#18#A4#18]  48.45,46.98 0 bottom
U$117  [#19#A5#19]  48.48,49.52 0 bottom
U$118  [#20#20]  49.75,64.76 0 bottom
U$119  [#GND#0]  36.36,80.02 0 bottom
U$120  [#21#21]  49.86,69.8 0 bottom
U$121  [#22#22]  49.73,72.32 0 bottom
U$122  [#23#23]  49.71,74.88 0 bottom
U$123  [#24#TX#24]  48.19,77.42 0 bottom
U$124  [#25#RX#25]  48.32,79.98 0 bottom
U$125  [#26#26]  33.52,69.86 0 bottom
U$126  [#27#27]  33.52,72.4 0 bottom
U$127  [#28#28]  33.52,74.94 0 bottom
U$128  [#29#29]  33.52,77.48 0 bottom
U$129  [#10#30]  33.45,52.06 0 top
U$130  [#11#30]  33.32,49.54 0 top
U$131  [#12#30]  33.43,47 0 top
U$132  [#13#30]  33.43,44.44 0 top
U$133  [1330]  35.52,41.41 0 top
U$134  [#0#1]  50.22,52.07 0 top
U$135  [#JP1#1]  46.16,31.26 0 bottom
U$136  [#JP2#4]  42.9,34.35 0 bottom
U$137  [ORDERING_INSTRUCTIONS]  82.8,63.5 0 top
U$138  [CHG0]  75.4,21.71 90 top
U$139  [RESET0]  72.29,23.13 90 top
U$140  [#VUSB#0]  55.09,41.91 0 bottom
U$141  [#VBAT#0]  55.09,36.83 0 bottom
U$142  [#EN#0]  55.09,39.37 0 bottom
U$143  [#GND#0]  74.97,34.3 0 bottom
U$144  [#3V3#0]  74.97,29.22 0 bottom
U$145  [##RESET##0]  74.97,26.68 0 bottom
U$146  [CHG0]  65.59,37.79 90 bottom
U$147  [MA0]  64.5,37.86 90 bottom
U$148  [#100#0]  62.62,39.11 90 bottom
U$149  [#500#0]  62.62,36.44 90 bottom
U$150  [THING_PLUS_0]  64.99,45.93 0 top
U$151  [AW#CU488_0]  65.04,44.32 0 top
U$152  [BOOT0]  63.37,23.22 90 top
U$153  [AZUREWAVE0]  65.12,47.46 0 top
U$154  [AZUREWAVE0]  65.02,72.39 0 bottom
U$155  [AW#CU488_0]  65.05,69.28 0 bottom
U$156  [THING_PLUS_0]  64.82,70.88 0 bottom
U$157  [#A1#6]  73.1,39.34 0 top
U$158  [#A2#6]  73,41.87 0 top
U$159  [#A3#6]  73.02,44.4 0 top
U$160  [#A4#6]  73.01,46.96 0 top
U$161  [#A5#6]  73.06,49.57 0 top
U$162  [#A0#30]  73.05,36.83 0 top
U$163  [#USBSHLD#GND#3]  66.17,16.13 0 bottom
U$164  [PWR0]  69.43,40.01 90 top
U$165  [#LED#0]  65.91,44.15 90 bottom
U$166  [#13#14]  56.79,44.45 0 bottom
U$167  [#12#14]  56.81,47 0 bottom
U$168  [#11#14]  56.68,49.53 0 bottom
U$169  [#10#14]  56.81,52.07 0 bottom
U$170  [#9#A6#14]  57.87,54.61 0 bottom
U$171  [#8#CS#14]  57.84,57.15 0 bottom
U$172  [#7#14]  56.44,59.71 0 bottom
U$173  [#6#SCL#14]  58.25,62.26 0 bottom
U$174  [#5#SDA#14]  58.38,64.77 0 bottom
U$175  [#4#TX1#14]  71.72,62.22 0 bottom
U$176  [#3#RX1#14]  71.8,59.69 0 bottom
U$177  [#2#POCI#14]  71.4,57.13 0 bottom
U$178  [#1#PICO#14]  71.56,54.59 0 bottom
U$179  [#0#SCK#14]  71.75,52.07 0 bottom
U$180  [#14#A0#15]  71.83,36.81 0 bottom
U$181  [#15#A1#15]  71.97,39.35 0 bottom
U$182  [#16#A2#16]  71.83,41.9 0 bottom
U$183  [#17#A3#17]  71.82,44.44 0 bottom
U$184  [#18#A4#18]  71.82,46.98 0 bottom
U$185  [#19#A5#19]  71.85,49.52 0 bottom
U$186  [#20#20]  73.12,64.76 0 bottom
U$187  [#GND#0]  59.73,80.02 0 bottom
U$188  [#21#21]  73.22,69.8 0 bottom
U$189  [#22#22]  73.1,72.32 0 bottom
U$190  [#23#23]  73.07,74.88 0 bottom
U$191  [#24#TX#24]  71.56,77.42 0 bottom
U$192  [#25#RX#25]  71.69,79.98 0 bottom
U$193  [#26#26]  56.88,69.86 0 bottom
U$194  [#27#27]  56.88,72.4 0 bottom
U$195  [#28#28]  56.88,74.94 0 bottom
U$196  [#29#29]  56.88,77.48 0 bottom
U$197  [#10#30]  56.81,52.06 0 top
U$198  [#11#30]  56.69,49.54 0 top
U$199  [#12#30]  56.8,47 0 top
U$200  [#13#30]  56.79,44.44 0 top
U$201  [1330]  58.88,41.41 0 top
U$202  [#0#1]  73.59,52.07 0 top
U$203  [#JP1#1]  69.53,31.26 0 bottom
U$204  [#JP2#4]  66.27,34.35 0 bottom
U$205  [ORDERING_INSTRUCTIONS]  106.17,63.5 0 top
U$206  [CHG0]  98.77,21.71 90 top
U$207  [RESET0]  95.66,23.13 90 top
U$208  [#VUSB#0]  78.46,41.91 0 bottom
U$209  [#VBAT#0]  78.46,36.83 0 bottom
U$210  [#EN#0]  78.46,39.37 0 bottom
U$211  [#GND#0]  98.34,34.3 0 bottom
U$212  [#3V3#0]  98.34,29.22 0 bottom
U$213  [##RESET##0]  98.34,26.68 0 bottom
U$214  [CHG0]  88.95,37.79 90 bottom
U$215  [MA0]  87.87,37.86 90 bottom
U$216  [#100#0]  85.99,39.11 90 bottom
U$217  [#500#0]  85.99,36.44 90 bottom
U$218  [THING_PLUS_0]  88.36,45.93 0 top
U$219  [AW#CU488_0]  88.4,44.32 0 top
U$220  [BOOT0]  86.74,23.22 90 top
U$221  [AZUREWAVE0]  88.48,47.46 0 top
U$222  [AZUREWAVE0]  88.39,72.39 0 bottom
U$223  [AW#CU488_0]  88.41,69.28 0 bottom
U$224  [THING_PLUS_0]  88.19,70.88 0 bottom
U$225  [#A1#6]  96.46,39.34 0 top
U$226  [#A2#6]  96.37,41.87 0 top
U$227  [#A3#6]  96.39,44.4 0 top
U$228  [#A4#6]  96.38,46.96 0 top
U$229  [#A5#6]  96.43,49.57 0 top
U$230  [#A0#30]  96.42,36.83 0 top
U$231  [#USBSHLD#GND#3]  89.54,16.13 0 bottom
U$232  [PWR0]  92.8,40.01 90 top
U$233  [#LED#0]  89.28,44.15 90 bottom
U$234  [#13#14]  80.16,44.45 0 bottom
U$235  [#12#14]  80.18,47 0 bottom
U$236  [#11#14]  80.05,49.53 0 bottom
U$237  [#10#14]  80.18,52.07 0 bottom
U$238  [#9#A6#14]  81.23,54.61 0 bottom
U$239  [#8#CS#14]  81.21,57.15 0 bottom
U$240  [#7#14]  79.81,59.71 0 bottom
U$241  [#6#SCL#14]  81.62,62.26 0 bottom
U$242  [#5#SDA#14]  81.75,64.77 0 bottom
U$243  [#4#TX1#14]  95.09,62.22 0 bottom
U$244  [#3#RX1#14]  95.17,59.69 0 bottom
U$245  [#2#POCI#14]  94.77,57.13 0 bottom
U$246  [#1#PICO#14]  94.92,54.59 0 bottom
U$247  [#0#SCK#14]  95.12,52.07 0 bottom
U$248  [#14#A0#15]  95.2,36.81 0 bottom
U$249  [#15#A1#15]  95.34,39.35 0 bottom
U$250  [#16#A2#16]  95.2,41.9 0 bottom
U$251  [#17#A3#17]  95.19,44.44 0 bottom
U$252  [#18#A4#18]  95.19,46.98 0 bottom
U$253  [#19#A5#19]  95.22,49.52 0 bottom
U$254  [#20#20]  96.48,64.76 0 bottom
U$255  [#GND#0]  83.1,80.02 0 bottom
U$256  [#21#21]  96.59,69.8 0 bottom
U$257  [#22#22]  96.46,72.32 0 bottom
U$258  [#23#23]  96.44,74.88 0 bottom
U$259  [#24#TX#24]  94.93,77.42 0 bottom
U$260  [#25#RX#25]  95.05,79.98 0 bottom
U$261  [#26#26]  80.25,69.86 0 bottom
U$262  [#27#27]  80.25,72.4 0 bottom
U$263  [#28#28]  80.25,74.94 0 bottom
U$264  [#29#29]  80.25,77.48 0 bottom
U$265  [#10#30]  80.18,52.06 0 top
U$266  [#11#30]  80.06,49.54 0 top
U$267  [#12#30]  80.17,47 0 top
U$268  [#13#30]  80.16,44.44 0 top
U$269  [1330]  82.25,41.41 0 top
U$270  [#0#1]  96.96,52.07 0 top
U$271  [#JP1#1]  92.9,31.26 0 bottom
U$272  [#JP2#4]  89.64,34.35 0 bottom
U$273  [ORDERING_INSTRUCTIONS]  129.54,63.5 0 top
U$274  [CHG0]  122.14,21.71 90 top
U$275  [RESET0]  119.03,23.13 90 top
U$276  [#VUSB#0]  101.83,41.91 0 bottom
U$277  [#VBAT#0]  101.83,36.83 0 bottom
U$278  [#EN#0]  101.83,39.37 0 bottom
U$279  [#GND#0]  121.71,34.3 0 bottom
U$280  [#3V3#0]  121.71,29.22 0 bottom
U$281  [##RESET##0]  121.71,26.68 0 bottom
U$282  [CHG0]  112.32,37.79 90 bottom
U$283  [MA0]  111.24,37.86 90 bottom
U$284  [#100#0]  109.36,39.11 90 bottom
U$285  [#500#0]  109.36,36.44 90 bottom
U$286  [THING_PLUS_0]  111.72,45.93 0 top
U$287  [AW#CU488_0]  111.77,44.32 0 top
U$288  [BOOT0]  110.11,23.22 90 top
U$289  [AZUREWAVE0]  111.85,47.46 0 top
U$290  [AZUREWAVE0]  111.76,72.39 0 bottom
U$291  [AW#CU488_0]  111.78,69.28 0 bottom
U$292  [THING_PLUS_0]  111.56,70.88 0 bottom
U$293  [#A1#6]  119.83,39.34 0 top
U$294  [#A2#6]  119.74,41.87 0 top
U$295  [#A3#6]  119.76,44.4 0 top
U$296  [#A4#6]  119.75,46.96 0 top
U$297  [#A5#6]  119.79,49.57 0 top
U$298  [#A0#30]  119.78,36.83 0 top
U$299  [#USBSHLD#GND#3]  112.9,16.13 0 bottom
U$300  [PWR0]  116.17,40.01 90 top
U$301  [#LED#0]  112.65,44.15 90 bottom
U$302  [#13#14]  103.53,44.45 0 bottom
U$303  [#12#14]  103.54,47 0 bottom
U$304  [#11#14]  103.41,49.53 0 bottom
U$305  [#10#14]  103.55,52.07 0 bottom
U$306  [#9#A6#14]  104.6,54.61 0 bottom
U$307  [#8#CS#14]  104.57,57.15 0 bottom
U$308  [#7#14]  103.17,59.71 0 bottom
U$309  [#6#SCL#14]  104.99,62.26 0 bottom
U$310  [#5#SDA#14]  105.12,64.77 0 bottom
U$311  [#4#TX1#14]  118.46,62.22 0 bottom
U$312  [#3#RX1#14]  118.54,59.69 0 bottom
U$313  [#2#POCI#14]  118.14,57.13 0 bottom
U$314  [#1#PICO#14]  118.29,54.59 0 bottom
U$315  [#0#SCK#14]  118.49,52.07 0 bottom
U$316  [#14#A0#15]  118.56,36.81 0 bottom
U$317  [#15#A1#15]  118.7,39.35 0 bottom
U$318  [#16#A2#16]  118.57,41.9 0 bottom
U$319  [#17#A3#17]  118.55,44.44 0 bottom
U$320  [#18#A4#18]  118.55,46.98 0 bottom
U$321  [#19#A5#19]  118.59,49.52 0 bottom
U$322  [#20#20]  119.85,64.76 0 bottom
U$323  [#GND#0]  106.47,80.02 0 bottom
U$324  [#21#21]  119.96,69.8 0 bottom
U$325  [#22#22]  119.83,72.32 0 bottom
U$326  [#23#23]  119.81,74.88 0 bottom
U$327  [#24#TX#24]  118.3,77.42 0 bottom
U$328  [#25#RX#25]  118.42,79.98 0 bottom
U$329  [#26#26]  103.62,69.86 0 bottom
U$330  [#27#27]  103.62,72.4 0 bottom
U$331  [#28#28]  103.62,74.94 0 bottom
U$332  [#29#29]  103.62,77.48 0 bottom
U$333  [#10#30]  103.55,52.06 0 top
U$334  [#11#30]  103.43,49.54 0 top
U$335  [#12#30]  103.54,47 0 top
U$336  [#13#30]  103.53,44.44 0 top
U$337  [1330]  105.62,41.41 0 top
U$338  [#0#1]  120.33,52.07 0 top
U$339  [#JP1#1]  116.27,31.26 0 bottom
U$340  [#JP2#4]  113,34.35 0 bottom
U$341  [ORDERING_INSTRUCTIONS]  36.07,147.32 0 top
U$342  [CHG0]  28.67,105.53 90 top
U$343  [RESET0]  25.55,106.95 90 top
U$344  [#VUSB#0]  8.36,125.73 0 bottom
U$345  [#VBAT#0]  8.36,120.65 0 bottom
U$346  [#EN#0]  8.36,123.19 0 bottom
U$347  [#GND#0]  28.23,118.12 0 bottom
U$348  [#3V3#0]  28.23,113.04 0 bottom
U$349  [##RESET##0]  28.23,110.5 0 bottom
U$350  [CHG0]  18.85,121.61 90 bottom
U$351  [MA0]  17.76,121.68 90 bottom
U$352  [#100#0]  15.89,122.93 90 bottom
U$353  [#500#0]  15.89,120.26 90 bottom
U$354  [THING_PLUS_0]  18.25,129.75 0 top
U$355  [AW#CU488_0]  18.3,128.14 0 top
U$356  [BOOT0]  16.64,107.04 90 top
U$357  [AZUREWAVE0]  18.38,131.28 0 top
U$358  [AZUREWAVE0]  18.29,156.21 0 bottom
U$359  [AW#CU488_0]  18.31,153.1 0 bottom
U$360  [THING_PLUS_0]  18.09,154.7 0 bottom
U$361  [#A1#6]  26.36,123.16 0 top
U$362  [#A2#6]  26.27,125.69 0 top
U$363  [#A3#6]  26.28,128.22 0 top
U$364  [#A4#6]  26.28,130.78 0 top
U$365  [#A5#6]  26.32,133.39 0 top
U$366  [#A0#30]  26.31,120.65 0 top
U$367  [#USBSHLD#GND#3]  19.43,99.95 0 bottom
U$368  [PWR0]  22.7,123.83 90 top
U$369  [#LED#0]  19.18,127.97 90 bottom
U$370  [#13#14]  10.05,128.27 0 bottom
U$371  [#12#14]  10.07,130.82 0 bottom
U$372  [#11#14]  9.94,133.35 0 bottom
U$373  [#10#14]  10.07,135.89 0 bottom